# EAGLE board SparkFun_6DoF_LSM6DSV16X-Panel (EAGLE 9.6.2), part 1 of 6
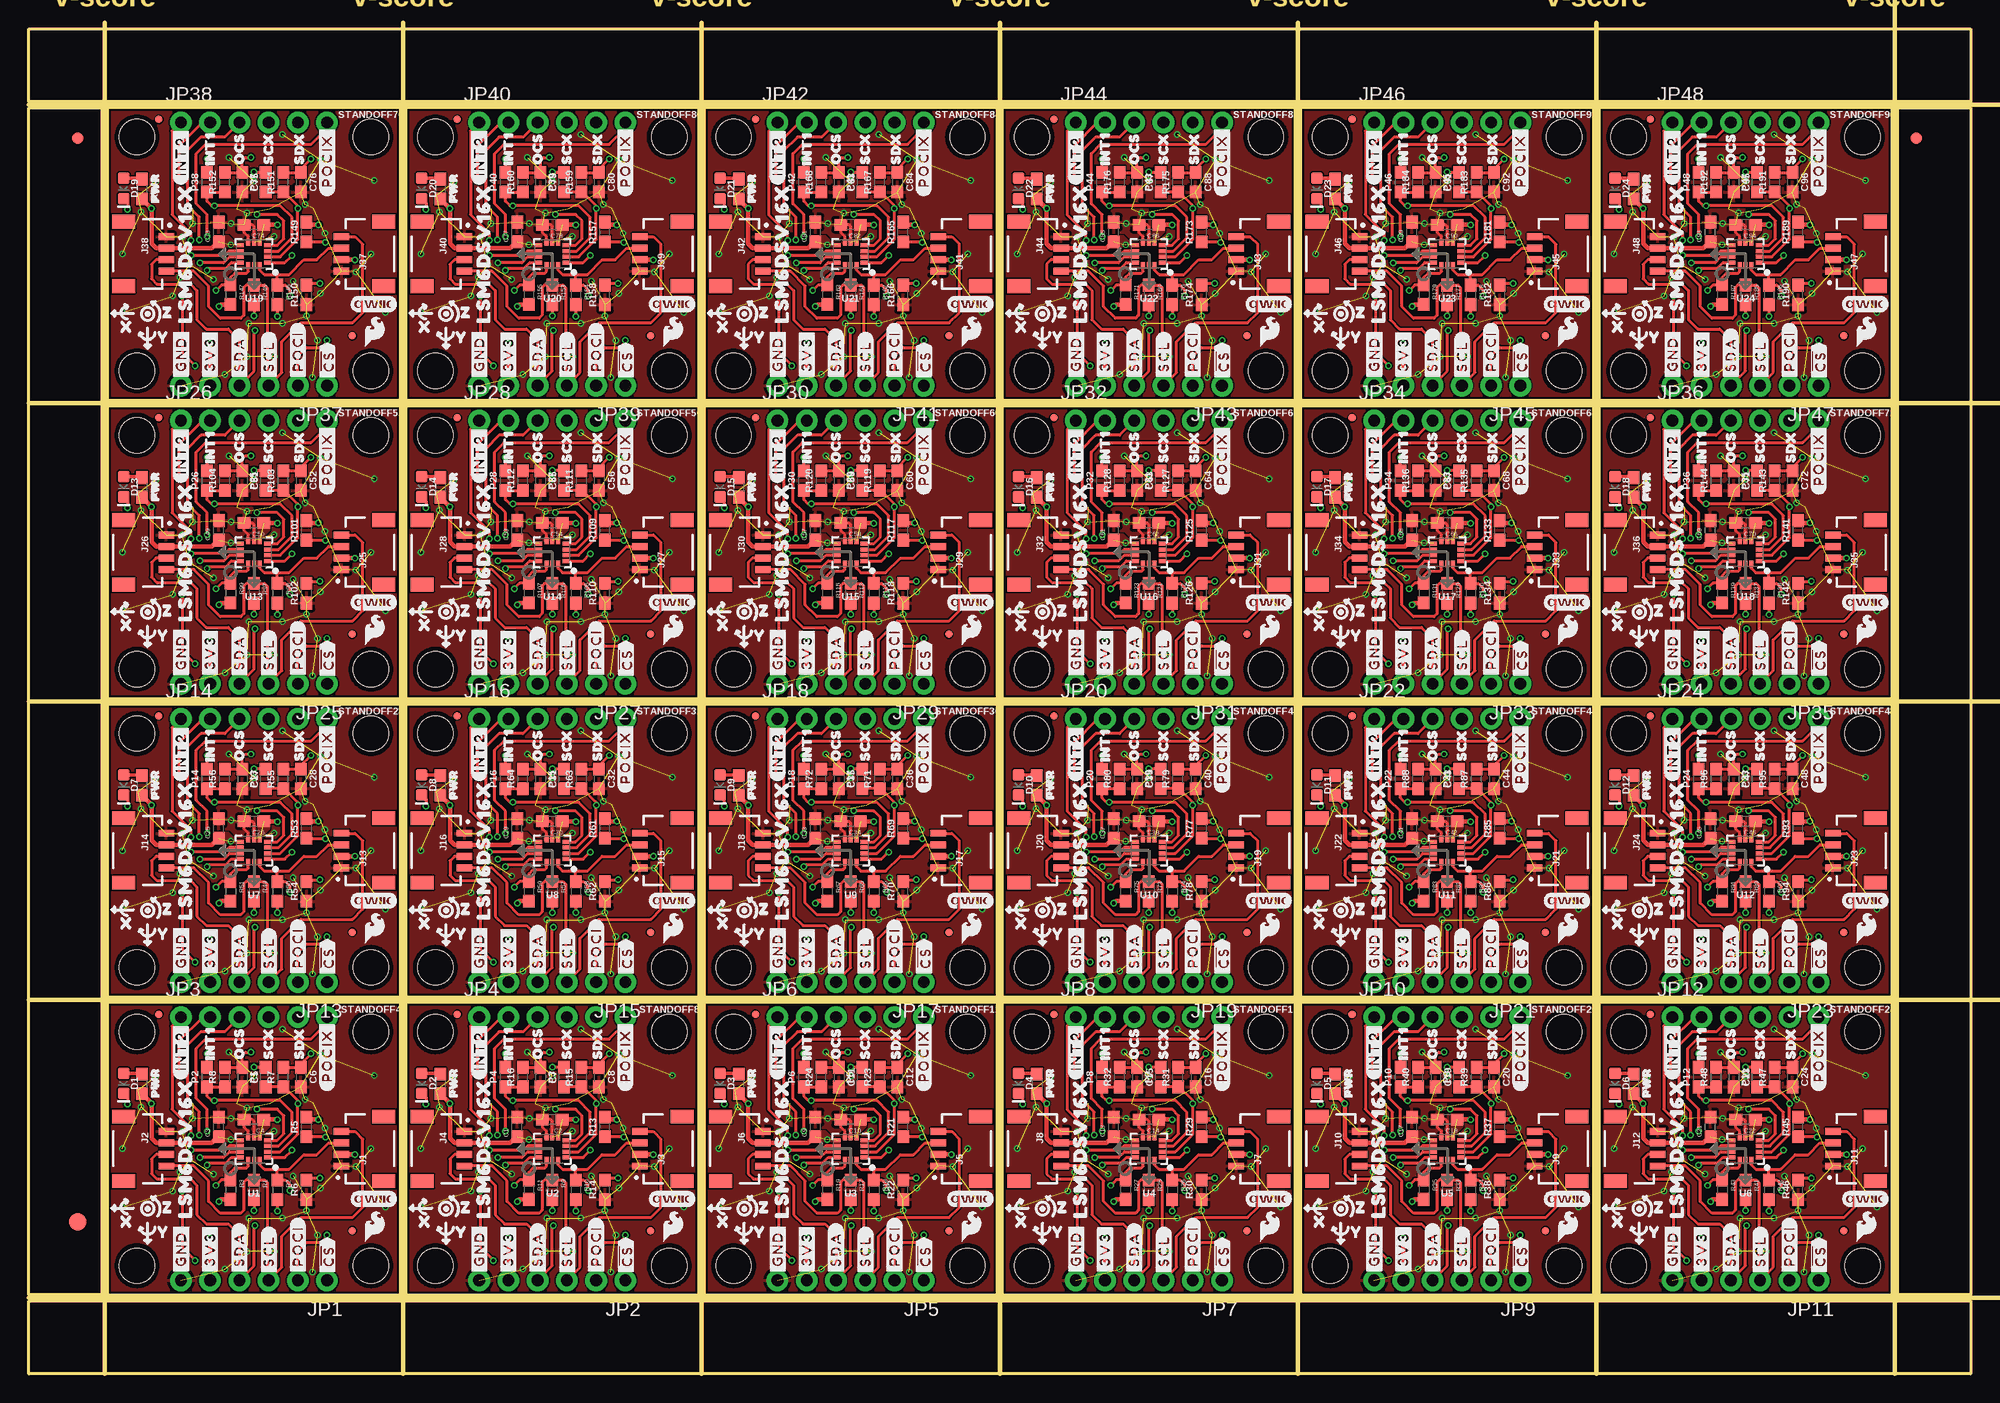
[diagram p0: board, top side]
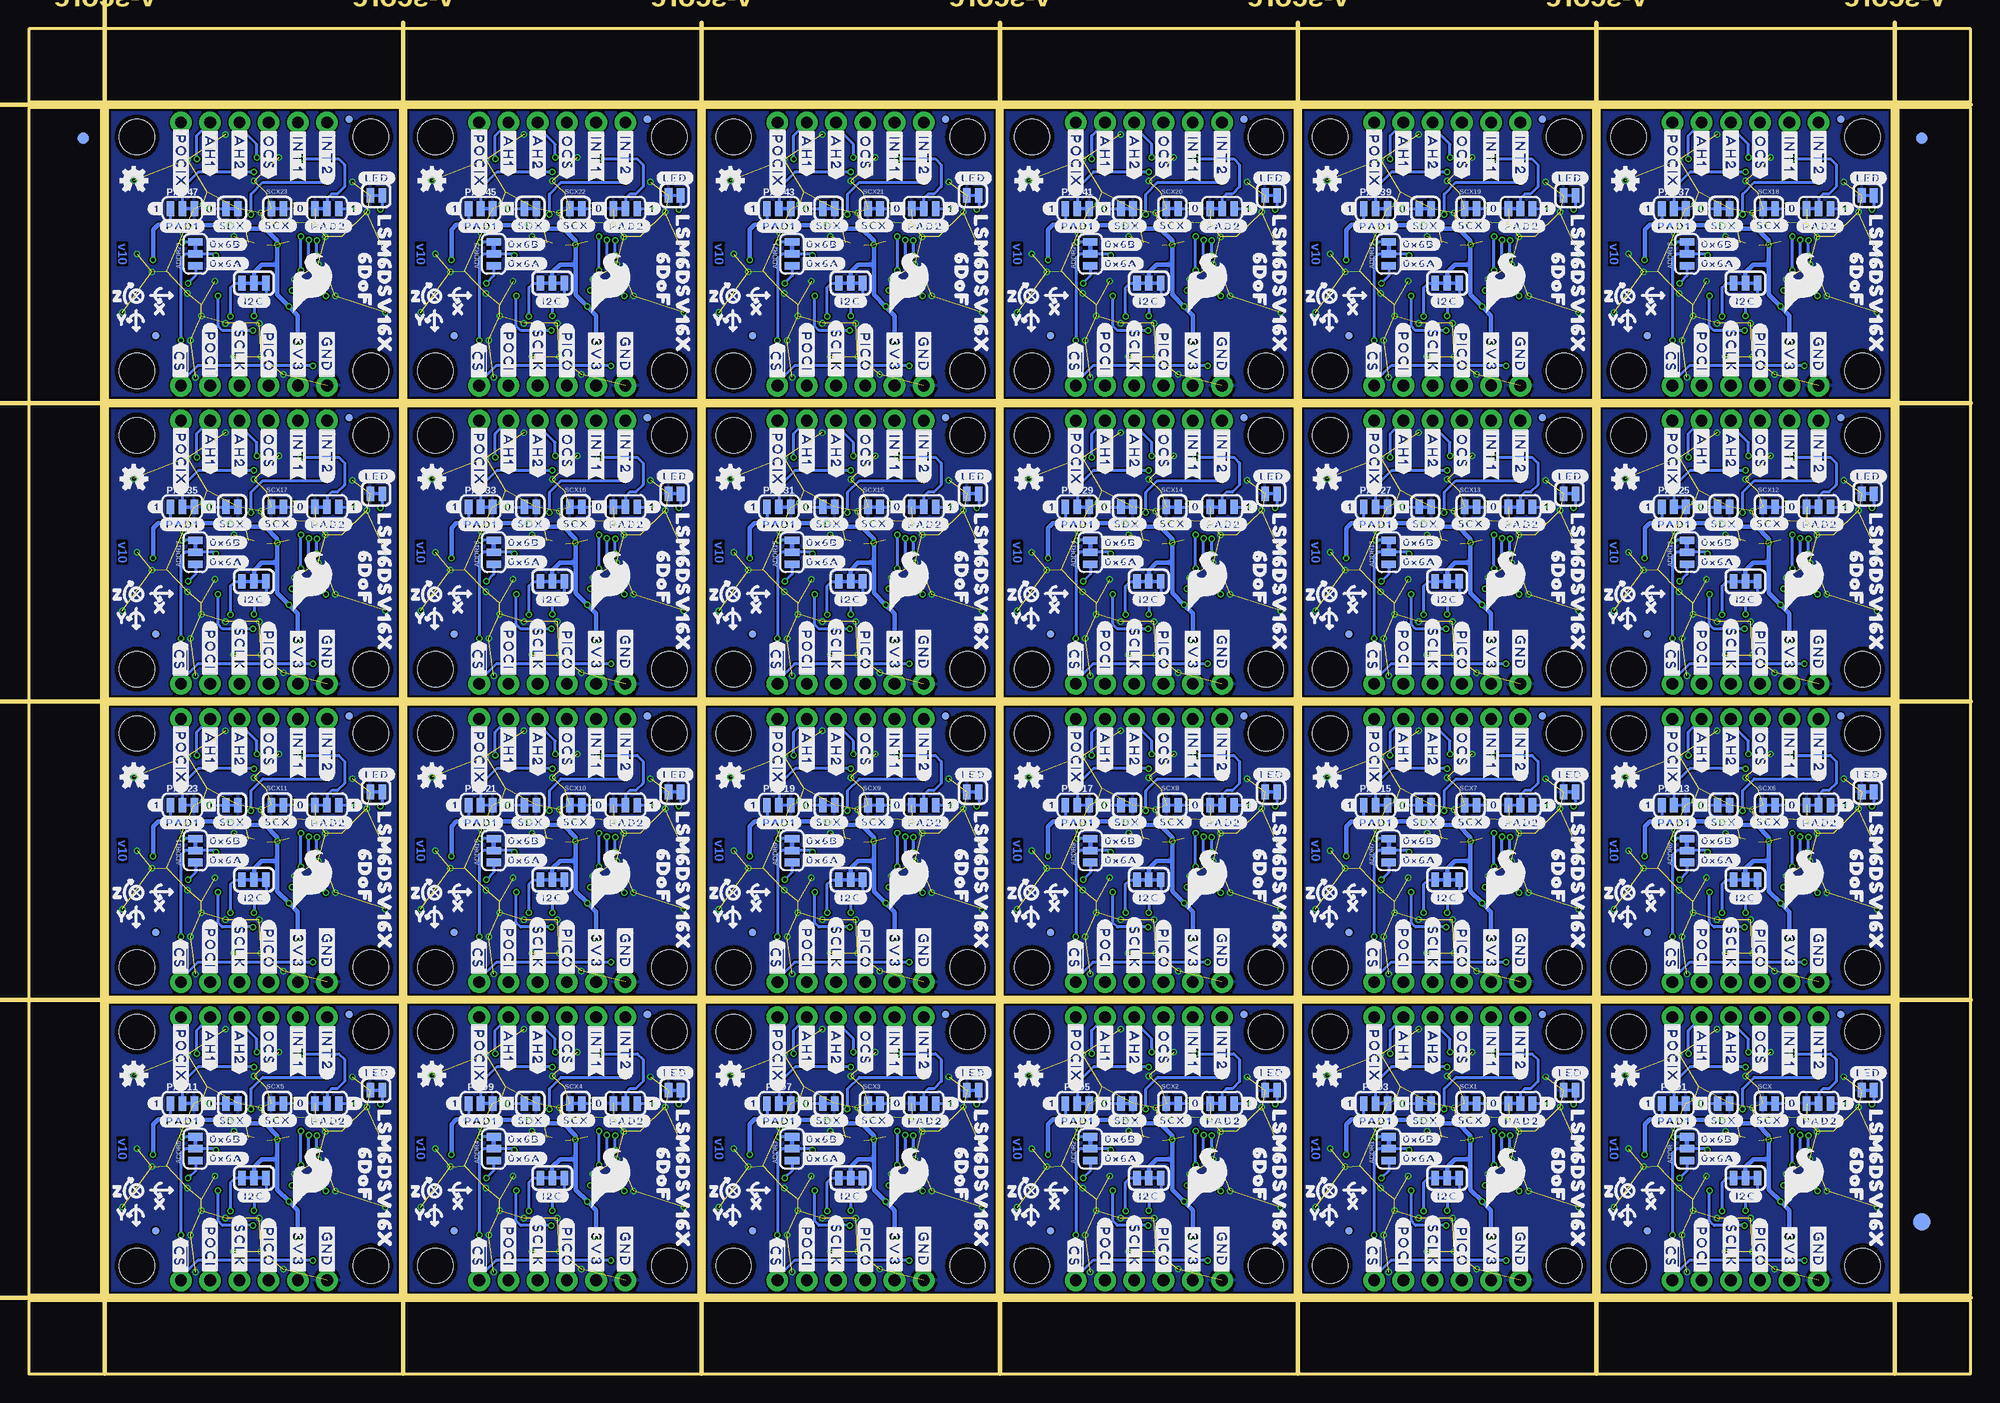
[diagram p1: board, bottom side, seen from below]

Size 168.66 x 116.84 mm. Coordinates in mm from the lower left corner, seen from the top.
Outline: 32.26,32.26 6.86,32.26 6.86,6.86 32.26,6.86 32.26,32.26
Outline: 58.17,32.26 32.77,32.26 32.77,6.86 58.17,6.86 58.17,32.26
Outline: 84.07,32.26 58.67,32.26 58.67,6.86 84.07,6.86 84.07,32.26
Outline: 109.98,32.26 84.58,32.26 84.58,6.86 109.98,6.86 109.98,32.26
Outline: 135.89,32.26 110.49,32.26 110.49,6.86 135.89,6.86 135.89,32.26
Outline: 161.8,32.26 136.4,32.26 136.4,6.86 161.8,6.86 161.8,32.26
Outline: 32.26,58.17 6.86,58.17 6.86,32.77 32.26,32.77 32.26,58.17
Outline: 58.17,58.17 32.77,58.17 32.77,32.77 58.17,32.77 58.17,58.17
Outline: 84.07,58.17 58.67,58.17 58.67,32.77 84.07,32.77 84.07,58.17
Outline: 109.98,58.17 84.58,58.17 84.58,32.77 109.98,32.77 109.98,58.17
Outline: 135.89,58.17 110.49,58.17 110.49,32.77 135.89,32.77 135.89,58.17
Outline: 161.8,58.17 136.4,58.17 136.4,32.77 161.8,32.77 161.8,58.17
Outline: 32.26,84.07 6.86,84.07 6.86,58.67 32.26,58.67 32.26,84.07
Outline: 58.17,84.07 32.77,84.07 32.77,58.67 58.17,58.67 58.17,84.07
Outline: 84.07,84.07 58.67,84.07 58.67,58.67 84.07,58.67 84.07,84.07
Outline: 109.98,84.07 84.58,84.07 84.58,58.67 109.98,58.67 109.98,84.07
Outline: 135.89,84.07 110.49,84.07 110.49,58.67 135.89,58.67 135.89,84.07
Outline: 161.8,84.07 136.4,84.07 136.4,58.67 161.8,58.67 161.8,84.07
Outline: 32.26,109.98 6.86,109.98 6.86,84.58 32.26,84.58 32.26,109.98
Outline: 58.17,109.98 32.77,109.98 32.77,84.58 58.17,84.58 58.17,109.98
Outline: 84.07,109.98 58.67,109.98 58.67,84.58 84.07,84.58 84.07,109.98
Outline: 109.98,109.98 84.58,109.98 84.58,84.58 109.98,84.58 109.98,109.98
Outline: 135.89,109.98 110.49,109.98 110.49,84.58 135.89,84.58 135.89,109.98
Outline: 161.8,109.98 136.4,109.98 136.4,84.58 161.8,84.58 161.8,109.98
Outline: 0,6.35 168.66,6.35 168.66,0 0,0 0,6.35
Outline: 162.31,109.98 168.66,109.98 168.66,6.86 162.31,6.86 162.31,109.98
Outline: 0,116.84 168.66,116.84 168.66,110.49 0,110.49 0,116.84
Outline: 0,109.98 6.35,109.98 6.35,6.86 0,6.86 0,109.98
Copper layers (1*16): Top 0.035mm / dielectric 1.5mm / Bottom 0.035mm
Design rules "SparkFun_6DoF_LSM6DSV16X": minimum track width 5mil, minimum drill 0.3mm, track to track 5mil, track to pad 5mil, pad to pad 5mil, via to via 5mil, smd to smd 5mil, copper to edge 7mil, drill to drill 7mil, minimum pad ring 5mil, minimum via ring 5mil, stop-mask expansion 2.5mil, vias tented up to drill 25mil, thermal gap 10mil
Milling: 12 lines

## Footprints (pad centres in the part's own frame; a part is rotated, then mirrored left to right if it is on the bottom)
SMT-JUMPER_3_1-NC_TRACE_SILK = smd 0.66 x 1.27: 1 -1.041,0; 2 0,0; 3 1.041,0
0603 = smd 1.1 x 1: 1 -0.85,0; 2 0.85,0
LED-0603 = smd 1 x 1: A -0.877,0; C 0.877,0
FIDUCIAL-1X2 = smd 1 x 1: 1 0,0
FIDUCIAL-1.5X3 = smd 1.5 x 1.5: 1 0,0
FIDUCIAL-MICRO = smd 0.635 x 0.635: 1 0,0
SMT-JUMPER_3_2-NC_TRACE_SILK = smd 0.66 x 1.27: 1 -1.041,0; 2 0,0; 3 1.041,0
JST04_1MM_RA = smd 0.6 x 1.35: 1 -1.5,0; 2 -0.5,0; 3 0.5,0; 4 1.5,0 | smd 1.2 x 2: NC1 2.8,-3.675; NC2 -2.8,-3.675
1X06_NO_SILK = drill 1.016 pad 1.88: 1 0,0; 2 2.54,0; 3 5.08,0; 4 7.62,0; 5 10.16,0; 6 12.7,0
SMT-JUMPER_2_NC_TRACE_SILK = smd 0.66 x 1.27: 1 -0.521,0; 2 0.521,0
STAND-OFF-TIGHT = hole 3.048: 0,0
LGA-14L = smd 0.575 x 0.35: P1 -1.163,0.75; P2 -1.163,0.25; P3 -1.163,-0.25; P4 -1.163,-0.75; P8 1.163,-0.75; P9 1.163,-0.25; P10 1.163,0.25; P11 1.163,0.75 | smd 0.35 x 0.575: P5 -0.5,-1; P6 0,-1; P7 0.5,-1; P12 0.5,1; P13 0,1; P14 -0.5,1

## Placement (x,y rotation side)
ADDR  JUMPER-SMT_3_1-NC_TRACE_SILK  [SMT-JUMPER_3_1-NC_TRACE_SILK]  24.64,19.56 90 bottom
ADDR1  JUMPER-SMT_3_1-NC_TRACE_SILK  [SMT-JUMPER_3_1-NC_TRACE_SILK]  50.55,19.56 90 bottom
ADDR2  JUMPER-SMT_3_1-NC_TRACE_SILK  [SMT-JUMPER_3_1-NC_TRACE_SILK]  76.45,19.56 90 bottom
ADDR3  JUMPER-SMT_3_1-NC_TRACE_SILK  [SMT-JUMPER_3_1-NC_TRACE_SILK]  102.36,19.56 90 bottom
ADDR4  JUMPER-SMT_3_1-NC_TRACE_SILK  [SMT-JUMPER_3_1-NC_TRACE_SILK]  128.27,19.56 90 bottom
ADDR5  JUMPER-SMT_3_1-NC_TRACE_SILK  [SMT-JUMPER_3_1-NC_TRACE_SILK]  154.18,19.56 90 bottom
ADDR6  JUMPER-SMT_3_1-NC_TRACE_SILK  [SMT-JUMPER_3_1-NC_TRACE_SILK]  24.64,45.47 90 bottom
ADDR7  JUMPER-SMT_3_1-NC_TRACE_SILK  [SMT-JUMPER_3_1-NC_TRACE_SILK]  50.55,45.47 90 bottom
ADDR8  JUMPER-SMT_3_1-NC_TRACE_SILK  [SMT-JUMPER_3_1-NC_TRACE_SILK]  76.45,45.47 90 bottom
ADDR9  JUMPER-SMT_3_1-NC_TRACE_SILK  [SMT-JUMPER_3_1-NC_TRACE_SILK]  102.36,45.47 90 bottom
ADDR10  JUMPER-SMT_3_1-NC_TRACE_SILK  [SMT-JUMPER_3_1-NC_TRACE_SILK]  128.27,45.47 90 bottom
ADDR11  JUMPER-SMT_3_1-NC_TRACE_SILK  [SMT-JUMPER_3_1-NC_TRACE_SILK]  154.18,45.47 90 bottom
ADDR12  JUMPER-SMT_3_1-NC_TRACE_SILK  [SMT-JUMPER_3_1-NC_TRACE_SILK]  24.64,71.37 90 bottom
ADDR13  JUMPER-SMT_3_1-NC_TRACE_SILK  [SMT-JUMPER_3_1-NC_TRACE_SILK]  50.55,71.37 90 bottom
ADDR14  JUMPER-SMT_3_1-NC_TRACE_SILK  [SMT-JUMPER_3_1-NC_TRACE_SILK]  76.45,71.37 90 bottom
ADDR15  JUMPER-SMT_3_1-NC_TRACE_SILK  [SMT-JUMPER_3_1-NC_TRACE_SILK]  102.36,71.37 90 bottom
ADDR16  JUMPER-SMT_3_1-NC_TRACE_SILK  [SMT-JUMPER_3_1-NC_TRACE_SILK]  128.27,71.37 90 bottom
ADDR17  JUMPER-SMT_3_1-NC_TRACE_SILK  [SMT-JUMPER_3_1-NC_TRACE_SILK]  154.18,71.37 90 bottom
ADDR18  JUMPER-SMT_3_1-NC_TRACE_SILK  [SMT-JUMPER_3_1-NC_TRACE_SILK]  24.64,97.28 90 bottom
ADDR19  JUMPER-SMT_3_1-NC_TRACE_SILK  [SMT-JUMPER_3_1-NC_TRACE_SILK]  50.55,97.28 90 bottom
ADDR20  JUMPER-SMT_3_1-NC_TRACE_SILK  [SMT-JUMPER_3_1-NC_TRACE_SILK]  76.45,97.28 90 bottom
ADDR21  JUMPER-SMT_3_1-NC_TRACE_SILK  [SMT-JUMPER_3_1-NC_TRACE_SILK]  102.36,97.28 90 bottom
ADDR22  JUMPER-SMT_3_1-NC_TRACE_SILK  [SMT-JUMPER_3_1-NC_TRACE_SILK]  128.27,97.28 90 bottom
ADDR23  JUMPER-SMT_3_1-NC_TRACE_SILK  [SMT-JUMPER_3_1-NC_TRACE_SILK]  154.18,97.28 90 bottom
C1  0.1uF  [0603]  42.42,21.46 90 top
C2  0.1uF  [0603]  45.47,22.1 180 top
C3  0.1uF  [0603]  16.51,21.46 90 top
C4  0.1uF  [0603]  19.56,22.1 180 top
C5  110pF  [0603]  18.54,25.78 270 top
C6  110pF  [0603]  23.62,25.78 270 top
C7  110pF  [0603]  44.45,25.78 270 top
C8  110pF  [0603]  49.53,25.78 270 top
C9  0.1uF  [0603]  68.33,21.46 90 top
C10  0.1uF  [0603]  71.37,22.1 180 top
C11  110pF  [0603]  70.36,25.78 270 top
C12  110pF  [0603]  75.44,25.78 270 top
C13  0.1uF  [0603]  94.23,21.46 90 top
C14  0.1uF  [0603]  97.28,22.1 180 top
C15  110pF  [0603]  96.27,25.78 270 top
C16  110pF  [0603]  101.35,25.78 270 top
C17  0.1uF  [0603]  120.14,21.46 90 top
C18  0.1uF  [0603]  123.19,22.1 180 top
C19  110pF  [0603]  122.17,25.78 270 top
C20  110pF  [0603]  127.25,25.78 270 top
C21  0.1uF  [0603]  146.05,21.46 90 top
C22  0.1uF  [0603]  149.1,22.1 180 top
C23  110pF  [0603]  148.08,25.78 270 top
C24  110pF  [0603]  153.16,25.78 270 top
C25  0.1uF  [0603]  16.51,47.37 90 top
C26  0.1uF  [0603]  19.56,48.01 180 top
C27  110pF  [0603]  18.54,51.69 270 top
C28  110pF  [0603]  23.62,51.69 270 top
C29  0.1uF  [0603]  42.42,47.37 90 top
C30  0.1uF  [0603]  45.47,48.01 180 top
C31  110pF  [0603]  44.45,51.69 270 top
C32  110pF  [0603]  49.53,51.69 270 top
C33  0.1uF  [0603]  68.33,47.37 90 top
C34  0.1uF  [0603]  71.37,48.01 180 top
C35  110pF  [0603]  70.36,51.69 270 top
C36  110pF  [0603]  75.44,51.69 270 top
C37  0.1uF  [0603]  94.23,47.37 90 top
C38  0.1uF  [0603]  97.28,48.01 180 top
C39  110pF  [0603]  96.27,51.69 270 top
C40  110pF  [0603]  101.35,51.69 270 top
C41  0.1uF  [0603]  120.14,47.37 90 top
C42  0.1uF  [0603]  123.19,48.01 180 top
C43  110pF  [0603]  122.17,51.69 270 top
C44  110pF  [0603]  127.25,51.69 270 top
C45  0.1uF  [0603]  146.05,47.37 90 top
C46  0.1uF  [0603]  149.1,48.01 180 top
C47  110pF  [0603]  148.08,51.69 270 top
C48  110pF  [0603]  153.16,51.69 270 top
C49  0.1uF  [0603]  16.51,73.28 90 top
C50  0.1uF  [0603]  19.56,73.91 180 top
C51  110pF  [0603]  18.54,77.6 270 top
C52  110pF  [0603]  23.62,77.6 270 top
C53  0.1uF  [0603]  42.42,73.28 90 top
C54  0.1uF  [0603]  45.47,73.91 180 top
C55  110pF  [0603]  44.45,77.6 270 top
C56  110pF  [0603]  49.53,77.6 270 top
C57  0.1uF  [0603]  68.33,73.28 90 top
C58  0.1uF  [0603]  71.37,73.91 180 top
C59  110pF  [0603]  70.36,77.6 270 top
C60  110pF  [0603]  75.44,77.6 270 top
C61  0.1uF  [0603]  94.23,73.28 90 top
C62  0.1uF  [0603]  97.28,73.91 180 top
C63  110pF  [0603]  96.27,77.6 270 top
C64  110pF  [0603]  101.35,77.6 270 top
C65  0.1uF  [0603]  120.14,73.28 90 top
C66  0.1uF  [0603]  123.19,73.91 180 top
C67  110pF  [0603]  122.17,77.6 270 top
C68  110pF  [0603]  127.25,77.6 270 top
C69  0.1uF  [0603]  146.05,73.28 90 top
C70  0.1uF  [0603]  149.1,73.91 180 top
C71  110pF  [0603]  148.08,77.6 270 top
C72  110pF  [0603]  153.16,77.6 270 top
C73  0.1uF  [0603]  16.51,99.19 90 top
C74  0.1uF  [0603]  19.56,99.82 180 top
C75  110pF  [0603]  18.54,103.51 270 top
C76  110pF  [0603]  23.62,103.51 270 top
C77  0.1uF  [0603]  42.42,99.19 90 top
C78  0.1uF  [0603]  45.47,99.82 180 top
C79  110pF  [0603]  44.45,103.51 270 top
C80  110pF  [0603]  49.53,103.51 270 top
C81  0.1uF  [0603]  68.33,99.19 90 top
C82  0.1uF  [0603]  71.37,99.82 180 top
C83  110pF  [0603]  70.36,103.51 270 top
C84  110pF  [0603]  75.44,103.51 270 top
C85  0.1uF  [0603]  94.23,99.19 90 top
C86  0.1uF  [0603]  97.28,99.82 180 top
C87  110pF  [0603]  96.27,103.51 270 top
C88  110pF  [0603]  101.35,103.51 270 top
C89  0.1uF  [0603]  120.14,99.19 90 top
C90  0.1uF  [0603]  123.19,99.82 180 top
C91  110pF  [0603]  122.17,103.51 270 top
C92  110pF  [0603]  127.25,103.51 270 top
C93  0.1uF  [0603]  146.05,99.19 90 top
C94  0.1uF  [0603]  149.1,99.82 180 top
C95  110pF  [0603]  148.08,103.51 270 top
C96  110pF  [0603]  153.16,103.51 270 top
D1  RED  [LED-0603]  8.23,25.25 270 top
D2  RED  [LED-0603]  34.14,25.25 270 top
D3  RED  [LED-0603]  60.05,25.25 270 top
D4  RED  [LED-0603]  85.95,25.25 270 top
D5  RED  [LED-0603]  111.86,25.25 270 top
D6  RED  [LED-0603]  137.77,25.25 270 top
D7  RED  [LED-0603]  8.23,51.16 270 top
D8  RED  [LED-0603]  34.14,51.16 270 top
D9  RED  [LED-0603]  60.05,51.16 270 top
D10  RED  [LED-0603]  85.95,51.16 270 top
D11  RED  [LED-0603]  111.86,51.16 270 top
D12  RED  [LED-0603]  137.77,51.16 270 top
D13  RED  [LED-0603]  8.23,77.06 270 top
D14  RED  [LED-0603]  34.14,77.06 270 top
D15  RED  [LED-0603]  60.05,77.06 270 top
D16  RED  [LED-0603]  85.95,77.06 270 top
D17  RED  [LED-0603]  111.86,77.06 270 top
D18  RED  [LED-0603]  137.77,77.06 270 top
D19  RED  [LED-0603]  8.23,102.97 270 top
D20  RED  [LED-0603]  34.14,102.97 270 top
D21  RED  [LED-0603]  60.05,102.97 270 top
D22  RED  [LED-0603]  85.95,102.97 270 top
D23  RED  [LED-0603]  111.86,102.97 270 top
D24  RED  [LED-0603]  137.77,102.97 270 top
E$1  [FIDUCIAL-1X2]  4.23,107.31 0 top
E$2  [FIDUCIAL-1X2]  4.23,107.31 0 bottom
E$3  [FIDUCIAL-1X2]  163.91,107.31 0 top
E$4  [FIDUCIAL-1X2]  163.91,107.31 0 bottom
E$5  [FIDUCIAL-1.5X3]  4.23,13.21 0 top
E$6  [FIDUCIAL-1.5X3]  4.23,13.21 0 bottom
FD1  FIDUCIALUFIDUCIAL  [FIDUCIAL-MICRO]  11.3,31.24 0 bottom
FD2  FIDUCIALUFIDUCIAL  [FIDUCIAL-MICRO]  28.09,12.45 0 bottom
FD3  FIDUCIALUFIDUCIAL  [FIDUCIAL-MICRO]  37.21,31.24 0 bottom
FD4  FIDUCIALUFIDUCIAL  [FIDUCIAL-MICRO]  54,12.45 0 bottom
FD5  FIDUCIALUFIDUCIAL  [FIDUCIAL-MICRO]  63.12,31.24 0 bottom
FD6  FIDUCIALUFIDUCIAL  [FIDUCIAL-MICRO]  79.91,12.45 0 bottom
FD7  FIDUCIALUFIDUCIAL  [FIDUCIAL-MICRO]  89.03,31.24 0 bottom
FD8  FIDUCIALUFIDUCIAL  [FIDUCIAL-MICRO]  105.82,12.45 0 bottom
FD9  FIDUCIALUFIDUCIAL  [FIDUCIAL-MICRO]  114.94,31.24 0 bottom
FD10  FIDUCIALUFIDUCIAL  [FIDUCIAL-MICRO]  131.72,12.45 0 bottom
FD11  FIDUCIALUFIDUCIAL  [FIDUCIAL-MICRO]  140.84,31.24 0 bottom
FD12  FIDUCIALUFIDUCIAL  [FIDUCIAL-MICRO]  157.63,12.45 0 bottom
FD13  FIDUCIALUFIDUCIAL  [FIDUCIAL-MICRO]  11.3,57.15 0 bottom
FD14  FIDUCIALUFIDUCIAL  [FIDUCIAL-MICRO]  28.09,38.35 0 bottom
FD15  FIDUCIALUFIDUCIAL  [FIDUCIAL-MICRO]  37.21,57.15 0 bottom
FD16  FIDUCIALUFIDUCIAL  [FIDUCIAL-MICRO]  54,38.35 0 bottom
FD17  FIDUCIALUFIDUCIAL  [FIDUCIAL-MICRO]  63.12,57.15 0 bottom
FD18  FIDUCIALUFIDUCIAL  [FIDUCIAL-MICRO]  79.91,38.35 0 bottom
FD19  FIDUCIALUFIDUCIAL  [FIDUCIAL-MICRO]  89.03,57.15 0 bottom
FD20  FIDUCIALUFIDUCIAL  [FIDUCIAL-MICRO]  105.82,38.35 0 bottom
FD21  FIDUCIALUFIDUCIAL  [FIDUCIAL-MICRO]  114.94,57.15 0 bottom
FD22  FIDUCIALUFIDUCIAL  [FIDUCIAL-MICRO]  131.72,38.35 0 bottom
FD23  FIDUCIALUFIDUCIAL  [FIDUCIAL-MICRO]  140.84,57.15 0 bottom
FD24  FIDUCIALUFIDUCIAL  [FIDUCIAL-MICRO]  157.63,38.35 0 bottom
FD25  FIDUCIALUFIDUCIAL  [FIDUCIAL-MICRO]  11.3,83.06 0 bottom
FD26  FIDUCIALUFIDUCIAL  [FIDUCIAL-MICRO]  28.09,64.26 0 bottom
FD27  FIDUCIALUFIDUCIAL  [FIDUCIAL-MICRO]  37.21,83.06 0 bottom
FD28  FIDUCIALUFIDUCIAL  [FIDUCIAL-MICRO]  54,64.26 0 bottom
FD29  FIDUCIALUFIDUCIAL  [FIDUCIAL-MICRO]  63.12,83.06 0 bottom
FD30  FIDUCIALUFIDUCIAL  [FIDUCIAL-MICRO]  79.91,64.26 0 bottom
FD31  FIDUCIALUFIDUCIAL  [FIDUCIAL-MICRO]  89.03,83.06 0 bottom
FD32  FIDUCIALUFIDUCIAL  [FIDUCIAL-MICRO]  105.82,64.26 0 bottom
FD33  FIDUCIALUFIDUCIAL  [FIDUCIAL-MICRO]  114.94,83.06 0 bottom
FD34  FIDUCIALUFIDUCIAL  [FIDUCIAL-MICRO]  131.72,64.26 0 bottom
FD35  FIDUCIALUFIDUCIAL  [FIDUCIAL-MICRO]  140.84,83.06 0 bottom
FD36  FIDUCIALUFIDUCIAL  [FIDUCIAL-MICRO]  157.63,64.26 0 bottom
FD37  FIDUCIALUFIDUCIAL  [FIDUCIAL-MICRO]  11.3,108.97 0 bottom
FD38  FIDUCIALUFIDUCIAL  [FIDUCIAL-MICRO]  28.09,90.17 0 bottom
FD39  FIDUCIALUFIDUCIAL  [FIDUCIAL-MICRO]  37.21,108.97 0 bottom
FD40  FIDUCIALUFIDUCIAL  [FIDUCIAL-MICRO]  54,90.17 0 bottom
FD41  FIDUCIALUFIDUCIAL  [FIDUCIAL-MICRO]  63.12,108.97 0 bottom
FD42  FIDUCIALUFIDUCIAL  [FIDUCIAL-MICRO]  79.91,90.17 0 bottom
FD43  FIDUCIALUFIDUCIAL  [FIDUCIAL-MICRO]  89.03,108.97 0 bottom
FD44  FIDUCIALUFIDUCIAL  [FIDUCIAL-MICRO]  105.82,90.17 0 bottom
FD45  FIDUCIALUFIDUCIAL  [FIDUCIAL-MICRO]  114.94,108.97 0 bottom
FD46  FIDUCIALUFIDUCIAL  [FIDUCIAL-MICRO]  131.72,90.17 0 bottom
FD47  FIDUCIALUFIDUCIAL  [FIDUCIAL-MICRO]  140.84,108.97 0 bottom
FD48  FIDUCIALUFIDUCIAL  [FIDUCIAL-MICRO]  157.63,90.17 0 bottom
FID1  FIDUCIALUFIDUCIAL  [FIDUCIAL-MICRO]  11.3,31.24 0 top
FID2  FIDUCIALUFIDUCIAL  [FIDUCIAL-MICRO]  28.09,12.45 0 top
FID3  FIDUCIALUFIDUCIAL  [FIDUCIAL-MICRO]  37.21,31.24 0 top
FID4  FIDUCIALUFIDUCIAL  [FIDUCIAL-MICRO]  54,12.45 0 top
FID5  FIDUCIALUFIDUCIAL  [FIDUCIAL-MICRO]  63.12,31.24 0 top
FID6  FIDUCIALUFIDUCIAL  [FIDUCIAL-MICRO]  79.91,12.45 0 top
FID7  FIDUCIALUFIDUCIAL  [FIDUCIAL-MICRO]  89.03,31.24 0 top
FID8  FIDUCIALUFIDUCIAL  [FIDUCIAL-MICRO]  105.82,12.45 0 top
FID9  FIDUCIALUFIDUCIAL  [FIDUCIAL-MICRO]  114.94,31.24 0 top
FID10  FIDUCIALUFIDUCIAL  [FIDUCIAL-MICRO]  131.72,12.45 0 top
FID11  FIDUCIALUFIDUCIAL  [FIDUCIAL-MICRO]  140.84,31.24 0 top
FID12  FIDUCIALUFIDUCIAL  [FIDUCIAL-MICRO]  157.63,12.45 0 top
FID13  FIDUCIALUFIDUCIAL  [FIDUCIAL-MICRO]  11.3,57.15 0 top
FID14  FIDUCIALUFIDUCIAL  [FIDUCIAL-MICRO]  28.09,38.35 0 top
FID15  FIDUCIALUFIDUCIAL  [FIDUCIAL-MICRO]  37.21,57.15 0 top
FID16  FIDUCIALUFIDUCIAL  [FIDUCIAL-MICRO]  54,38.35 0 top
FID17  FIDUCIALUFIDUCIAL  [FIDUCIAL-MICRO]  63.12,57.15 0 top
FID18  FIDUCIALUFIDUCIAL  [FIDUCIAL-MICRO]  79.91,38.35 0 top
FID19  FIDUCIALUFIDUCIAL  [FIDUCIAL-MICRO]  89.03,57.15 0 top
FID20  FIDUCIALUFIDUCIAL  [FIDUCIAL-MICRO]  105.82,38.35 0 top
FID21  FIDUCIALUFIDUCIAL  [FIDUCIAL-MICRO]  114.94,57.15 0 top
FID22  FIDUCIALUFIDUCIAL  [FIDUCIAL-MICRO]  131.72,38.35 0 top
FID23  FIDUCIALUFIDUCIAL  [FIDUCIAL-MICRO]  140.84,57.15 0 top
FID24  FIDUCIALUFIDUCIAL  [FIDUCIAL-MICRO]  157.63,38.35 0 top
FID25  FIDUCIALUFIDUCIAL  [FIDUCIAL-MICRO]  11.3,83.06 0 top
FID26  FIDUCIALUFIDUCIAL  [FIDUCIAL-MICRO]  28.09,64.26 0 top
FID27  FIDUCIALUFIDUCIAL  [FIDUCIAL-MICRO]  37.21,83.06 0 top
FID28  FIDUCIALUFIDUCIAL  [FIDUCIAL-MICRO]  54,64.26 0 top
FID29  FIDUCIALUFIDUCIAL  [FIDUCIAL-MICRO]  63.12,83.06 0 top
FID30  FIDUCIALUFIDUCIAL  [FIDUCIAL-MICRO]  79.91,64.26 0 top
FID31  FIDUCIALUFIDUCIAL  [FIDUCIAL-MICRO]  89.03,83.06 0 top
FID32  FIDUCIALUFIDUCIAL  [FIDUCIAL-MICRO]  105.82,64.26 0 top
FID33  FIDUCIALUFIDUCIAL  [FIDUCIAL-MICRO]  114.94,83.06 0 top
FID34  FIDUCIALUFIDUCIAL  [FIDUCIAL-MICRO]  131.72,64.26 0 top
FID35  FIDUCIALUFIDUCIAL  [FIDUCIAL-MICRO]  140.84,83.06 0 top
FID36  FIDUCIALUFIDUCIAL  [FIDUCIAL-MICRO]  157.63,64.26 0 top
FID37  FIDUCIALUFIDUCIAL  [FIDUCIAL-MICRO]  11.3,108.97 0 top
FID38  FIDUCIALUFIDUCIAL  [FIDUCIAL-MICRO]  28.09,90.17 0 top
FID39  FIDUCIALUFIDUCIAL  [FIDUCIAL-MICRO]  37.21,108.97 0 top
FID40  FIDUCIALUFIDUCIAL  [FIDUCIAL-MICRO]  54,90.17 0 top
FID41  FIDUCIALUFIDUCIAL  [FIDUCIAL-MICRO]  63.12,108.97 0 top
FID42  FIDUCIALUFIDUCIAL  [FIDUCIAL-MICRO]  79.91,90.17 0 top
FID43  FIDUCIALUFIDUCIAL  [FIDUCIAL-MICRO]  89.03,108.97 0 top
FID44  FIDUCIALUFIDUCIAL  [FIDUCIAL-MICRO]  105.82,90.17 0 top
FID45  FIDUCIALUFIDUCIAL  [FIDUCIAL-MICRO]  114.94,108.97 0 top
FID46  FIDUCIALUFIDUCIAL  [FIDUCIAL-MICRO]  131.72,90.17 0 top
FID47  FIDUCIALUFIDUCIAL  [FIDUCIAL-MICRO]  140.84,108.97 0 top
FID48  FIDUCIALUFIDUCIAL  [FIDUCIAL-MICRO]  157.63,90.17 0 top
FRAME1  FRAME-LEDGER  [CREATIVE_COMMONS]  14.99,-16 0 top  (outside the outline)
FRAME2  FRAME-LEDGER  [CREATIVE_COMMONS]  -10.92,-16 0 top  (outside the outline)
FRAME3  FRAME-LEDGER  [CREATIVE_COMMONS]  40.89,-16 0 top  (outside the outline)
FRAME4  FRAME-LEDGER  [CREATIVE_COMMONS]  66.8,-16 0 top  (outside the outline)
FRAME5  FRAME-LEDGER  [CREATIVE_COMMONS]  92.71,-16 0 top  (outside the outline)
FRAME6  FRAME-LEDGER  [CREATIVE_COMMONS]  118.62,-16 0 top  (outside the outline)
FRAME7  FRAME-LEDGER  [CREATIVE_COMMONS]  -10.92,9.91 0 top  (outside the outline)
FRAME8  FRAME-LEDGER  [CREATIVE_COMMONS]  14.99,9.91 0 top
FRAME9  FRAME-LEDGER  [CREATIVE_COMMONS]  40.89,9.91 0 top
FRAME10  FRAME-LEDGER  [CREATIVE_COMMONS]  66.8,9.91 0 top
FRAME11  FRAME-LEDGER  [CREATIVE_COMMONS]  92.71,9.91 0 top
FRAME12  FRAME-LEDGER  [CREATIVE_COMMONS]  118.62,9.91 0 top
FRAME13  FRAME-LEDGER  [CREATIVE_COMMONS]  -10.92,35.81 0 top  (outside the outline)
FRAME14  FRAME-LEDGER  [CREATIVE_COMMONS]  14.99,35.81 0 top
FRAME15  FRAME-LEDGER  [CREATIVE_COMMONS]  40.89,35.81 0 top
FRAME16  FRAME-LEDGER  [CREATIVE_COMMONS]  66.8,35.81 0 top
FRAME17  FRAME-LEDGER  [CREATIVE_COMMONS]  92.71,35.81 0 top
FRAME18  FRAME-LEDGER  [CREATIVE_COMMONS]  118.62,35.81 0 top
FRAME19  FRAME-LEDGER  [CREATIVE_COMMONS]  -10.92,61.72 0 top  (outside the outline)
FRAME20  FRAME-LEDGER  [CREATIVE_COMMONS]  14.99,61.72 0 top
FRAME21  FRAME-LEDGER  [CREATIVE_COMMONS]  40.89,61.72 0 top
FRAME22  FRAME-LEDGER  [CREATIVE_COMMONS]  66.8,61.72 0 top
FRAME23  FRAME-LEDGER  [CREATIVE_COMMONS]  92.71,61.72 0 top
FRAME24  FRAME-LEDGER  [CREATIVE_COMMONS]  118.62,61.72 0 top
I2C_PU  S_MODE  [SMT-JUMPER_3_2-NC_TRACE_SILK]  19.56,17.02 180 bottom
I2C_PU1  S_MODE  [SMT-JUMPER_3_2-NC_TRACE_SILK]  45.47,17.02 180 bottom
I2C_PU2  S_MODE  [SMT-JUMPER_3_2-NC_TRACE_SILK]  71.37,17.02 180 bottom
I2C_PU3  S_MODE  [SMT-JUMPER_3_2-NC_TRACE_SILK]  97.28,17.02 180 bottom
I2C_PU4  S_MODE  [SMT-JUMPER_3_2-NC_TRACE_SILK]  123.19,17.02 180 bottom
I2C_PU5  S_MODE  [SMT-JUMPER_3_2-NC_TRACE_SILK]  149.1,17.02 180 bottom
I2C_PU6  S_MODE  [SMT-JUMPER_3_2-NC_TRACE_SILK]  19.56,42.93 180 bottom
I2C_PU7  S_MODE  [SMT-JUMPER_3_2-NC_TRACE_SILK]  45.47,42.93 180 bottom
I2C_PU8  S_MODE  [SMT-JUMPER_3_2-NC_TRACE_SILK]  71.37,42.93 180 bottom
I2C_PU9  S_MODE  [SMT-JUMPER_3_2-NC_TRACE_SILK]  97.28,42.93 180 bottom
I2C_PU10  S_MODE  [SMT-JUMPER_3_2-NC_TRACE_SILK]  123.19,42.93 180 bottom
I2C_PU11  S_MODE  [SMT-JUMPER_3_2-NC_TRACE_SILK]  149.1,42.93 180 bottom
I2C_PU12  S_MODE  [SMT-JUMPER_3_2-NC_TRACE_SILK]  19.56,68.83 180 bottom
I2C_PU13  S_MODE  [SMT-JUMPER_3_2-NC_TRACE_SILK]  45.47,68.83 180 bottom
I2C_PU14  S_MODE  [SMT-JUMPER_3_2-NC_TRACE_SILK]  71.37,68.83 180 bottom
I2C_PU15  S_MODE  [SMT-JUMPER_3_2-NC_TRACE_SILK]  97.28,68.83 180 bottom
I2C_PU16  S_MODE  [SMT-JUMPER_3_2-NC_TRACE_SILK]  123.19,68.83 180 bottom
I2C_PU17  S_MODE  [SMT-JUMPER_3_2-NC_TRACE_SILK]  149.1,68.83 180 bottom
I2C_PU18  S_MODE  [SMT-JUMPER_3_2-NC_TRACE_SILK]  19.56,94.74 180 bottom
I2C_PU19  S_MODE  [SMT-JUMPER_3_2-NC_TRACE_SILK]  45.47,94.74 180 bottom
I2C_PU20  S_MODE  [SMT-JUMPER_3_2-NC_TRACE_SILK]  71.37,94.74 180 bottom
I2C_PU21  S_MODE  [SMT-JUMPER_3_2-NC_TRACE_SILK]  97.28,94.74 180 bottom
I2C_PU22  S_MODE  [SMT-JUMPER_3_2-NC_TRACE_SILK]  123.19,94.74 180 bottom
I2C_PU23  S_MODE  [SMT-JUMPER_3_2-NC_TRACE_SILK]  149.1,94.74 180 bottom
J1  QWIIC_RIGHT_ANGLE  [JST04_1MM_RA]  27.15,19.56 90 top
J2  QWIIC_RIGHT_ANGLE  [JST04_1MM_RA]  11.94,19.56 270 top
J3  QWIIC_RIGHT_ANGLE  [JST04_1MM_RA]  53.06,19.56 90 top
J4  QWIIC_RIGHT_ANGLE  [JST04_1MM_RA]  37.85,19.56 270 top
J5  QWIIC_RIGHT_ANGLE  [JST04_1MM_RA]  78.97,19.56 90 top
J6  QWIIC_RIGHT_ANGLE  [JST04_1MM_RA]  63.75,19.56 270 top
J7  QWIIC_RIGHT_ANGLE  [JST04_1MM_RA]  104.88,19.56 90 top
J8  QWIIC_RIGHT_ANGLE  [JST04_1MM_RA]  89.66,19.56 270 top
J9  QWIIC_RIGHT_ANGLE  [JST04_1MM_RA]  130.78,19.56 90 top
J10  QWIIC_RIGHT_ANGLE  [JST04_1MM_RA]  115.57,19.56 270 top
J11  QWIIC_RIGHT_ANGLE  [JST04_1MM_RA]  156.69,19.56 90 top
J12  QWIIC_RIGHT_ANGLE  [JST04_1MM_RA]  141.48,19.56 270 top
J13  QWIIC_RIGHT_ANGLE  [JST04_1MM_RA]  27.15,45.47 90 top
J14  QWIIC_RIGHT_ANGLE  [JST04_1MM_RA]  11.94,45.47 270 top
J15  QWIIC_RIGHT_ANGLE  [JST04_1MM_RA]  53.06,45.47 90 top
J16  QWIIC_RIGHT_ANGLE  [JST04_1MM_RA]  37.85,45.47 270 top
J17  QWIIC_RIGHT_ANGLE  [JST04_1MM_RA]  78.97,45.47 90 top
J18  QWIIC_RIGHT_ANGLE  [JST04_1MM_RA]  63.75,45.47 270 top
J19  QWIIC_RIGHT_ANGLE  [JST04_1MM_RA]  104.88,45.47 90 top
J20  QWIIC_RIGHT_ANGLE  [JST04_1MM_RA]  89.66,45.47 270 top
J21  QWIIC_RIGHT_ANGLE  [JST04_1MM_RA]  130.78,45.47 90 top
J22  QWIIC_RIGHT_ANGLE  [JST04_1MM_RA]  115.57,45.47 270 top
J23  QWIIC_RIGHT_ANGLE  [JST04_1MM_RA]  156.69,45.47 90 top
J24  QWIIC_RIGHT_ANGLE  [JST04_1MM_RA]  141.48,45.47 270 top
J25  QWIIC_RIGHT_ANGLE  [JST04_1MM_RA]  27.15,71.37 90 top
J26  QWIIC_RIGHT_ANGLE  [JST04_1MM_RA]  11.94,71.37 270 top
J27  QWIIC_RIGHT_ANGLE  [JST04_1MM_RA]  53.06,71.37 90 top
J28  QWIIC_RIGHT_ANGLE  [JST04_1MM_RA]  37.85,71.37 270 top
J29  QWIIC_RIGHT_ANGLE  [JST04_1MM_RA]  78.97,71.37 90 top
J30  QWIIC_RIGHT_ANGLE  [JST04_1MM_RA]  63.75,71.37 270 top
J31  QWIIC_RIGHT_ANGLE  [JST04_1MM_RA]  104.88,71.37 90 top
J32  QWIIC_RIGHT_ANGLE  [JST04_1MM_RA]  89.66,71.37 270 top
J33  QWIIC_RIGHT_ANGLE  [JST04_1MM_RA]  130.78,71.37 90 top
J34  QWIIC_RIGHT_ANGLE  [JST04_1MM_RA]  115.57,71.37 270 top
J35  QWIIC_RIGHT_ANGLE  [JST04_1MM_RA]  156.69,71.37 90 top
J36  QWIIC_RIGHT_ANGLE  [JST04_1MM_RA]  141.48,71.37 270 top
J37  QWIIC_RIGHT_ANGLE  [JST04_1MM_RA]  27.15,97.28 90 top
J38  QWIIC_RIGHT_ANGLE  [JST04_1MM_RA]  11.94,97.28 270 top
J39  QWIIC_RIGHT_ANGLE  [JST04_1MM_RA]  53.06,97.28 90 top
J40  QWIIC_RIGHT_ANGLE  [JST04_1MM_RA]  37.85,97.28 270 top
J41  QWIIC_RIGHT_ANGLE  [JST04_1MM_RA]  78.97,97.28 90 top
J42  QWIIC_RIGHT_ANGLE  [JST04_1MM_RA]  63.75,97.28 270 top
J43  QWIIC_RIGHT_ANGLE  [JST04_1MM_RA]  104.88,97.28 90 top
J44  QWIIC_RIGHT_ANGLE  [JST04_1MM_RA]  89.66,97.28 270 top
J45  QWIIC_RIGHT_ANGLE  [JST04_1MM_RA]  130.78,97.28 90 top
J46  QWIIC_RIGHT_ANGLE  [JST04_1MM_RA]  115.57,97.28 270 top
J47  QWIIC_RIGHT_ANGLE  [JST04_1MM_RA]  156.69,97.28 90 top
J48  QWIIC_RIGHT_ANGLE  [JST04_1MM_RA]  141.48,97.28 270 top
JP1  IO  [1X06_NO_SILK]  25.91,8.13 180 top
JP2  IO  [1X06_NO_SILK]  51.82,8.13 180 top
JP3  IO  [1X06_NO_SILK]  13.21,30.99 0 top
JP4  IO  [1X06_NO_SILK]  39.12,30.99 0 top
JP5  IO  [1X06_NO_SILK]  77.72,8.13 180 top
JP6  IO  [1X06_NO_SILK]  65.02,30.99 0 top
JP7  IO  [1X06_NO_SILK]  103.63,8.13 180 top
JP8  IO  [1X06_NO_SILK]  90.93,30.99 0 top
JP9  IO  [1X06_NO_SILK]  129.54,8.13 180 top
JP10  IO  [1X06_NO_SILK]  116.84,30.99 0 top
JP11  IO  [1X06_NO_SILK]  155.45,8.13 180 top
JP12  IO  [1X06_NO_SILK]  142.75,30.99 0 top
JP13  IO  [1X06_NO_SILK]  25.91,34.04 180 top
JP14  IO  [1X06_NO_SILK]  13.21,56.9 0 top
JP15  IO  [1X06_NO_SILK]  51.82,34.04 180 top
JP16  IO  [1X06_NO_SILK]  39.12,56.9 0 top
JP17  IO  [1X06_NO_SILK]  77.72,34.04 180 top
JP18  IO  [1X06_NO_SILK]  65.02,56.9 0 top
JP19  IO  [1X06_NO_SILK]  103.63,34.04 180 top
JP20  IO  [1X06_NO_SILK]  90.93,56.9 0 top
JP21  IO  [1X06_NO_SILK]  129.54,34.04 180 top
JP22  IO  [1X06_NO_SILK]  116.84,56.9 0 top
JP23  IO  [1X06_NO_SILK]  155.45,34.04 180 top
JP24  IO  [1X06_NO_SILK]  142.75,56.9 0 top
JP25  IO  [1X06_NO_SILK]  25.91,59.94 180 top
JP26  IO  [1X06_NO_SILK]  13.21,82.8 0 top
JP27  IO  [1X06_NO_SILK]  51.82,59.94 180 top
JP28  IO  [1X06_NO_SILK]  39.12,82.8 0 top
JP29  IO  [1X06_NO_SILK]  77.72,59.94 180 top
JP30  IO  [1X06_NO_SILK]  65.02,82.8 0 top
JP31  IO  [1X06_NO_SILK]  103.63,59.94 180 top
JP32  IO  [1X06_NO_SILK]  90.93,82.8 0 top
JP33  IO  [1X06_NO_SILK]  129.54,59.94 180 top
JP34  IO  [1X06_NO_SILK]  116.84,82.8 0 top
JP35  IO  [1X06_NO_SILK]  155.45,59.94 180 top
JP36  IO  [1X06_NO_SILK]  142.75,82.8 0 top
JP37  IO  [1X06_NO_SILK]  25.91,85.85 180 top
JP38  IO  [1X06_NO_SILK]  13.21,108.71 0 top
JP39  IO  [1X06_NO_SILK]  51.82,85.85 180 top
JP40  IO  [1X06_NO_SILK]  39.12,108.71 0 top
JP41  IO  [1X06_NO_SILK]  77.72,85.85 180 top
JP42  IO  [1X06_NO_SILK]  65.02,108.71 0 top
JP43  IO  [1X06_NO_SILK]  103.63,85.85 180 top
JP44  IO  [1X06_NO_SILK]  90.93,108.71 0 top
JP45  IO  [1X06_NO_SILK]  129.54,85.85 180 top
JP46  IO  [1X06_NO_SILK]  116.84,108.71 0 top
JP47  IO  [1X06_NO_SILK]  155.45,85.85 180 top
JP48  IO  [1X06_NO_SILK]  142.75,108.71 0 top
LED  JUMPER-SMT_2_NC_TRACE_SILK  [SMT-JUMPER_2_NC_TRACE_SILK]  8.94,24.64 0 bottom
LED1  JUMPER-SMT_2_NC_TRACE_SILK  [SMT-JUMPER_2_NC_TRACE_SILK]  34.85,24.64 0 bottom
LED2  JUMPER-SMT_2_NC_TRACE_SILK  [SMT-JUMPER_2_NC_TRACE_SILK]  60.76,24.64 0 bottom
LED3  JUMPER-SMT_2_NC_TRACE_SILK  [SMT-JUMPER_2_NC_TRACE_SILK]  86.66,24.64 0 bottom
LED4  JUMPER-SMT_2_NC_TRACE_SILK  [SMT-JUMPER_2_NC_TRACE_SILK]  112.57,24.64 0 bottom
LED5  JUMPER-SMT_2_NC_TRACE_SILK  [SMT-JUMPER_2_NC_TRACE_SILK]  138.48,24.64 0 bottom
LED6  JUMPER-SMT_2_NC_TRACE_SILK  [SMT-JUMPER_2_NC_TRACE_SILK]  8.94,50.55 0 bottom
LED7  JUMPER-SMT_2_NC_TRACE_SILK  [SMT-JUMPER_2_NC_TRACE_SILK]  34.85,50.55 0 bottom
LED8  JUMPER-SMT_2_NC_TRACE_SILK  [SMT-JUMPER_2_NC_TRACE_SILK]  60.76,50.55 0 bottom
LED9  JUMPER-SMT_2_NC_TRACE_SILK  [SMT-JUMPER_2_NC_TRACE_SILK]  86.66,50.55 0 bottom
LED10  JUMPER-SMT_2_NC_TRACE_SILK  [SMT-JUMPER_2_NC_TRACE_SILK]  112.57,50.55 0 bottom
LED11  JUMPER-SMT_2_NC_TRACE_SILK  [SMT-JUMPER_2_NC_TRACE_SILK]  138.48,50.55 0 bottom
LED12  JUMPER-SMT_2_NC_TRACE_SILK  [SMT-JUMPER_2_NC_TRACE_SILK]  8.94,76.45 0 bottom
LED13  JUMPER-SMT_2_NC_TRACE_SILK  [SMT-JUMPER_2_NC_TRACE_SILK]  34.85,76.45 0 bottom
LED14  JUMPER-SMT_2_NC_TRACE_SILK  [SMT-JUMPER_2_NC_TRACE_SILK]  60.76,76.45 0 bottom
LED15  JUMPER-SMT_2_NC_TRACE_SILK  [SMT-JUMPER_2_NC_TRACE_SILK]  86.66,76.45 0 bottom
LED16  JUMPER-SMT_2_NC_TRACE_SILK  [SMT-JUMPER_2_NC_TRACE_SILK]  112.57,76.45 0 bottom
LED17  JUMPER-SMT_2_NC_TRACE_SILK  [SMT-JUMPER_2_NC_TRACE_SILK]  138.48,76.45 0 bottom
LED18  JUMPER-SMT_2_NC_TRACE_SILK  [SMT-JUMPER_2_NC_TRACE_SILK]  8.94,102.36 0 bottom
LED19  JUMPER-SMT_2_NC_TRACE_SILK  [SMT-JUMPER_2_NC_TRACE_SILK]  34.85,102.36 0 bottom
LED20  JUMPER-SMT_2_NC_TRACE_SILK  [SMT-JUMPER_2_NC_TRACE_SILK]  60.76,102.36 0 bottom
LED21  JUMPER-SMT_2_NC_TRACE_SILK  [SMT-JUMPER_2_NC_TRACE_SILK]  86.66,102.36 0 bottom
LED22  JUMPER-SMT_2_NC_TRACE_SILK  [SMT-JUMPER_2_NC_TRACE_SILK]  112.57,102.36 0 bottom
LED23  JUMPER-SMT_2_NC_TRACE_SILK  [SMT-JUMPER_2_NC_TRACE_SILK]  138.48,102.36 0 bottom
LOGO1  QWIIC_LOGO_4MM  [QWIIC_4MM]  29.97,15.19 0 top
LOGO2  OSHW-LOGOMINI  [OSHW-LOGO-MINI]  30,25.94 0 bottom
LOGO3  SFE_LOGO_NAME_FLAMEBLANK  [BLANK]  -31.24,-17.27 0 top  (outside the outline)
LOGO4  OSHW-LOGOMINI  [OSHW-LOGO-MINI]  55.91,25.94 0 bottom
LOGO5  QWIIC_LOGO_4MM  [QWIIC_4MM]  55.88,15.19 0 top
LOGO6  SFE_LOGO_NAME_FLAMEBLANK  [BLANK]  -5.33,-17.27 0 top  (outside the outline)
LOGO7  OSHW-LOGOMINI  [OSHW-LOGO-MINI]  81.81,25.94 0 bottom
LOGO8  QWIIC_LOGO_4MM  [QWIIC_4MM]  81.79,15.19 0 top
LOGO9  SFE_LOGO_NAME_FLAMEBLANK  [BLANK]  20.57,-17.27 0 top  (outside the outline)
LOGO10  OSHW-LOGOMINI  [OSHW-LOGO-MINI]  107.72,25.94 0 bottom
LOGO11  QWIIC_LOGO_4MM  [QWIIC_4MM]  107.7,15.19 0 top
LOGO12  SFE_LOGO_NAME_FLAMEBLANK  [BLANK]  46.48,-17.27 0 top  (outside the outline)
LOGO13  OSHW-LOGOMINI  [OSHW-LOGO-MINI]  133.63,25.94 0 bottom
LOGO14  QWIIC_LOGO_4MM  [QWIIC_4MM]  133.6,15.19 0 top
LOGO15  SFE_LOGO_NAME_FLAMEBLANK  [BLANK]  72.39,-17.27 0 top  (outside the outline)
LOGO16  OSHW-LOGOMINI  [OSHW-LOGO-MINI]  159.54,25.94 0 bottom
LOGO17  QWIIC_LOGO_4MM  [QWIIC_4MM]  159.51,15.19 0 top
LOGO18  SFE_LOGO_NAME_FLAMEBLANK  [BLANK]  98.3,-17.27 0 top  (outside the outline)
LOGO19  OSHW-LOGOMINI  [OSHW-LOGO-MINI]  30,51.85 0 bottom
LOGO20  QWIIC_LOGO_4MM  [QWIIC_4MM]  29.97,41.1 0 top
LOGO21  SFE_LOGO_NAME_FLAMEBLANK  [BLANK]  -31.24,8.64 0 top  (outside the outline)
LOGO22  OSHW-LOGOMINI  [OSHW-LOGO-MINI]  55.91,51.85 0 bottom
LOGO23  QWIIC_LOGO_4MM  [QWIIC_4MM]  55.88,41.1 0 top
LOGO24  SFE_LOGO_NAME_FLAMEBLANK  [BLANK]  -5.33,8.64 0 top  (outside the outline)
LOGO25  OSHW-LOGOMINI  [OSHW-LOGO-MINI]  81.81,51.85 0 bottom
LOGO26  QWIIC_LOGO_4MM  [QWIIC_4MM]  81.79,41.1 0 top
LOGO27  SFE_LOGO_NAME_FLAMEBLANK  [BLANK]  20.57,8.64 0 top
LOGO28  OSHW-LOGOMINI  [OSHW-LOGO-MINI]  107.72,51.85 0 bottom
LOGO29  QWIIC_LOGO_4MM  [QWIIC_4MM]  107.7,41.1 0 top
LOGO30  SFE_LOGO_NAME_FLAMEBLANK  [BLANK]  46.48,8.64 0 top
LOGO31  OSHW-LOGOMINI  [OSHW-LOGO-MINI]  133.63,51.85 0 bottom
LOGO32  QWIIC_LOGO_4MM  [QWIIC_4MM]  133.6,41.1 0 top
LOGO33  SFE_LOGO_NAME_FLAMEBLANK  [BLANK]  72.39,8.64 0 top
LOGO34  OSHW-LOGOMINI  [OSHW-LOGO-MINI]  159.54,51.85 0 bottom
LOGO35  QWIIC_LOGO_4MM  [QWIIC_4MM]  159.51,41.1 0 top
LOGO36  SFE_LOGO_NAME_FLAMEBLANK  [BLANK]  98.3,8.64 0 top
LOGO37  OSHW-LOGOMINI  [OSHW-LOGO-MINI]  30,77.76 0 bottom
LOGO38  QWIIC_LOGO_4MM  [QWIIC_4MM]  29.97,67.01 0 top
LOGO39  SFE_LOGO_NAME_FLAMEBLANK  [BLANK]  -31.24,34.54 0 top  (outside the outline)
LOGO40  OSHW-LOGOMINI  [OSHW-LOGO-MINI]  55.91,77.76 0 bottom
LOGO41  QWIIC_LOGO_4MM  [QWIIC_4MM]  55.88,67.01 0 top
LOGO42  SFE_LOGO_NAME_FLAMEBLANK  [BLANK]  -5.33,34.54 0 top  (outside the outline)
LOGO43  OSHW-LOGOMINI  [OSHW-LOGO-MINI]  81.81,77.76 0 bottom
LOGO44  QWIIC_LOGO_4MM  [QWIIC_4MM]  81.79,67.01 0 top
LOGO45  SFE_LOGO_NAME_FLAMEBLANK  [BLANK]  20.57,34.54 0 top
LOGO46  OSHW-LOGOMINI  [OSHW-LOGO-MINI]  107.72,77.76 0 bottom
LOGO47  QWIIC_LOGO_4MM  [QWIIC_4MM]  107.7,67.01 0 top
LOGO48  SFE_LOGO_NAME_FLAMEBLANK  [BLANK]  46.48,34.54 0 top
LOGO49  OSHW-LOGOMINI  [OSHW-LOGO-MINI]  133.63,77.76 0 bottom
LOGO50  QWIIC_LOGO_4MM  [QWIIC_4MM]  133.6,67.01 0 top
LOGO51  SFE_LOGO_NAME_FLAMEBLANK  [BLANK]  72.39,34.54 0 top
LOGO52  OSHW-LOGOMINI  [OSHW-LOGO-MINI]  159.54,77.76 0 bottom
LOGO53  QWIIC_LOGO_4MM  [QWIIC_4MM]  159.51,67.01 0 top
LOGO54  SFE_LOGO_NAME_FLAMEBLANK  [BLANK]  98.3,34.54 0 top
LOGO55  OSHW-LOGOMINI  [OSHW-LOGO-MINI]  30,103.66 0 bottom
LOGO56  QWIIC_LOGO_4MM  [QWIIC_4MM]  29.97,92.91 0 top
LOGO57  SFE_LOGO_NAME_FLAMEBLANK  [BLANK]  -31.24,60.45 0 top  (outside the outline)
LOGO58  OSHW-LOGOMINI  [OSHW-LOGO-MINI]  55.91,103.66 0 bottom
LOGO59  QWIIC_LOGO_4MM  [QWIIC_4MM]  55.88,92.91 0 top
LOGO60  SFE_LOGO_NAME_FLAMEBLANK  [BLANK]  -5.33,60.45 0 top  (outside the outline)
LOGO61  OSHW-LOGOMINI  [OSHW-LOGO-MINI]  81.81,103.66 0 bottom
LOGO62  QWIIC_LOGO_4MM  [QWIIC_4MM]  81.79,92.91 0 top
LOGO63  SFE_LOGO_NAME_FLAMEBLANK  [BLANK]  20.57,60.45 0 top
LOGO64  OSHW-LOGOMINI  [OSHW-LOGO-MINI]  107.72,103.66 0 bottom
LOGO65  QWIIC_LOGO_4MM  [QWIIC_4MM]  107.7,92.91 0 top
LOGO66  SFE_LOGO_NAME_FLAMEBLANK  [BLANK]  46.48,60.45 0 top
LOGO67  OSHW-LOGOMINI  [OSHW-LOGO-MINI]  133.63,103.66 0 bottom
LOGO68  QWIIC_LOGO_4MM  [QWIIC_4MM]  133.6,92.91 0 top
LOGO69  SFE_LOGO_NAME_FLAMEBLANK  [BLANK]  72.39,60.45 0 top
LOGO70  OSHW-LOGOMINI  [OSHW-LOGO-MINI]  159.54,103.66 0 bottom
LOGO71  QWIIC_LOGO_4MM  [QWIIC_4MM]  159.51,92.91 0 top
LOGO72  SFE_LOGO_NAME_FLAMEBLANK  [BLANK]  98.3,60.45 0 top
P1  110pF  [0603]  20.57,25.78 90 top
P2  110pF  [0603]  15.49,25.78 90 top
P3  110pF  [0603]  46.48,25.78 90 top
P4  110pF  [0603]  41.4,25.78 90 top
P5  110pF  [0603]  72.39,25.78 90 top
P6  110pF  [0603]  67.31,25.78 90 top
P7  110pF  [0603]  98.3,25.78 90 top
P8  110pF  [0603]  93.22,25.78 90 top
P9  110pF  [0603]  124.21,25.78 90 top
P10  110pF  [0603]  119.13,25.78 90 top
P11  110pF  [0603]  150.11,25.78 90 top
P12  110pF  [0603]  145.03,25.78 90 top
P13  110pF  [0603]  20.57,51.69 90 top
P14  110pF  [0603]  15.49,51.69 90 top
P15  110pF  [0603]  46.48,51.69 90 top
P16  110pF  [0603]  41.4,51.69 90 top
P17  110pF  [0603]  72.39,51.69 90 top
P18  110pF  [0603]  67.31,51.69 90 top
P19  110pF  [0603]  98.3,51.69 90 top
P20  110pF  [0603]  93.22,51.69 90 top
P21  110pF  [0603]  124.21,51.69 90 top
P22  110pF  [0603]  119.13,51.69 90 top
P23  110pF  [0603]  150.11,51.69 90 top
P24  110pF  [0603]  145.03,51.69 90 top
P25  110pF  [0603]  20.57,77.6 90 top
P26  110pF  [0603]  15.49,77.6 90 top
P27  110pF  [0603]  46.48,77.6 90 top
P28  110pF  [0603]  41.4,77.6 90 top
P29  110pF  [0603]  72.39,77.6 90 top
P30  110pF  [0603]  67.31,77.6 90 top
P31  110pF  [0603]  98.3,77.6 90 top
P32  110pF  [0603]  93.22,77.6 90 top
P33  110pF  [0603]  124.21,77.6 90 top
P34  110pF  [0603]  119.13,77.6 90 top
P35  110pF  [0603]  150.11,77.6 90 top
P36  110pF  [0603]  145.03,77.6 90 top
P37  110pF  [0603]  20.57,103.51 90 top
P38  110pF  [0603]  15.49,103.51 90 top
P39  110pF  [0603]  46.48,103.51 90 top
P40  110pF  [0603]  41.4,103.51 90 top
P41  110pF  [0603]  72.39,103.51 90 top
P42  110pF  [0603]  67.31,103.51 90 top
P43  110pF  [0603]  98.3,103.51 90 top
P44  110pF  [0603]  93.22,103.51 90 top
P45  110pF  [0603]  124.21,103.51 90 top
P46  110pF  [0603]  119.13,103.51 90 top
P47  110pF  [0603]  150.11,103.51 90 top
P48  110pF  [0603]  145.03,103.51 90 top
PAD1  JUMPER-SMT_3_1-NC_TRACE_SILK  [SMT-JUMPER_3_1-NC_TRACE_SILK]  25.78,23.5 0 bottom
PAD2  JUMPER-SMT_3_1-NC_TRACE_SILK  [SMT-JUMPER_3_1-NC_TRACE_SILK]  13.21,23.5 180 bottom
PAD3  JUMPER-SMT_3_1-NC_TRACE_SILK  [SMT-JUMPER_3_1-NC_TRACE_SILK]  51.69,23.5 0 bottom
PAD4  JUMPER-SMT_3_1-NC_TRACE_SILK  [SMT-JUMPER_3_1-NC_TRACE_SILK]  39.12,23.5 180 bottom
PAD5  JUMPER-SMT_3_1-NC_TRACE_SILK  [SMT-JUMPER_3_1-NC_TRACE_SILK]  77.6,23.5 0 bottom
PAD6  JUMPER-SMT_3_1-NC_TRACE_SILK  [SMT-JUMPER_3_1-NC_TRACE_SILK]  65.02,23.5 180 bottom
PAD7  JUMPER-SMT_3_1-NC_TRACE_SILK  [SMT-JUMPER_3_1-NC_TRACE_SILK]  103.51,23.5 0 bottom
PAD8  JUMPER-SMT_3_1-NC_TRACE_SILK  [SMT-JUMPER_3_1-NC_TRACE_SILK]  90.93,23.5 180 bottom
PAD9  JUMPER-SMT_3_1-NC_TRACE_SILK  [SMT-JUMPER_3_1-NC_TRACE_SILK]  129.41,23.5 0 bottom
PAD10  JUMPER-SMT_3_1-NC_TRACE_SILK  [SMT-JUMPER_3_1-NC_TRACE_SILK]  116.84,23.5 180 bottom
PAD11  JUMPER-SMT_3_1-NC_TRACE_SILK  [SMT-JUMPER_3_1-NC_TRACE_SILK]  155.32,23.5 0 bottom
PAD12  JUMPER-SMT_3_1-NC_TRACE_SILK  [SMT-JUMPER_3_1-NC_TRACE_SILK]  142.75,23.5 180 bottom
PAD13  JUMPER-SMT_3_1-NC_TRACE_SILK  [SMT-JUMPER_3_1-NC_TRACE_SILK]  25.78,49.4 0 bottom
PAD14  JUMPER-SMT_3_1-NC_TRACE_SILK  [SMT-JUMPER_3_1-NC_TRACE_SILK]  13.21,49.4 180 bottom
PAD15  JUMPER-SMT_3_1-NC_TRACE_SILK  [SMT-JUMPER_3_1-NC_TRACE_SILK]  51.69,49.4 0 bottom
PAD16  JUMPER-SMT_3_1-NC_TRACE_SILK  [SMT-JUMPER_3_1-NC_TRACE_SILK]  39.12,49.4 180 bottom
PAD17  JUMPER-SMT_3_1-NC_TRACE_SILK  [SMT-JUMPER_3_1-NC_TRACE_SILK]  77.6,49.4 0 bottom
PAD18  JUMPER-SMT_3_1-NC_TRACE_SILK  [SMT-JUMPER_3_1-NC_TRACE_SILK]  65.02,49.4 180 bottom
PAD19  JUMPER-SMT_3_1-NC_TRACE_SILK  [SMT-JUMPER_3_1-NC_TRACE_SILK]  103.51,49.4 0 bottom
PAD20  JUMPER-SMT_3_1-NC_TRACE_SILK  [SMT-JUMPER_3_1-NC_TRACE_SILK]  90.93,49.4 180 bottom
PAD21  JUMPER-SMT_3_1-NC_TRACE_SILK  [SMT-JUMPER_3_1-NC_TRACE_SILK]  129.41,49.4 0 bottom
PAD22  JUMPER-SMT_3_1-NC_TRACE_SILK  [SMT-JUMPER_3_1-NC_TRACE_SILK]  116.84,49.4 180 bottom
PAD23  JUMPER-SMT_3_1-NC_TRACE_SILK  [SMT-JUMPER_3_1-NC_TRACE_SILK]  155.32,49.4 0 bottom
PAD24  JUMPER-SMT_3_1-NC_TRACE_SILK  [SMT-JUMPER_3_1-NC_TRACE_SILK]  142.75,49.4 180 bottom
PAD25  JUMPER-SMT_3_1-NC_TRACE_SILK  [SMT-JUMPER_3_1-NC_TRACE_SILK]  25.78,75.31 0 bottom
PAD26  JUMPER-SMT_3_1-NC_TRACE_SILK  [SMT-JUMPER_3_1-NC_TRACE_SILK]  13.21,75.31 180 bottom
PAD27  JUMPER-SMT_3_1-NC_TRACE_SILK  [SMT-JUMPER_3_1-NC_TRACE_SILK]  51.69,75.31 0 bottom
PAD28  JUMPER-SMT_3_1-NC_TRACE_SILK  [SMT-JUMPER_3_1-NC_TRACE_SILK]  39.12,75.31 180 bottom
PAD29  JUMPER-SMT_3_1-NC_TRACE_SILK  [SMT-JUMPER_3_1-NC_TRACE_SILK]  77.6,75.31 0 bottom
PAD30  JUMPER-SMT_3_1-NC_TRACE_SILK  [SMT-JUMPER_3_1-NC_TRACE_SILK]  65.02,75.31 180 bottom
PAD31  JUMPER-SMT_3_1-NC_TRACE_SILK  [SMT-JUMPER_3_1-NC_TRACE_SILK]  103.51,75.31 0 bottom
PAD32  JUMPER-SMT_3_1-NC_TRACE_SILK  [SMT-JUMPER_3_1-NC_TRACE_SILK]  90.93,75.31 180 bottom
PAD33  JUMPER-SMT_3_1-NC_TRACE_SILK  [SMT-JUMPER_3_1-NC_TRACE_SILK]  129.41,75.31 0 bottom
PAD34  JUMPER-SMT_3_1-NC_TRACE_SILK  [SMT-JUMPER_3_1-NC_TRACE_SILK]  116.84,75.31 180 bottom
PAD35  JUMPER-SMT_3_1-NC_TRACE_SILK  [SMT-JUMPER_3_1-NC_TRACE_SILK]  155.32,75.31 0 bottom
PAD36  JUMPER-SMT_3_1-NC_TRACE_SILK  [SMT-JUMPER_3_1-NC_TRACE_SILK]  142.75,75.31 180 bottom
PAD37  JUMPER-SMT_3_1-NC_TRACE_SILK  [SMT-JUMPER_3_1-NC_TRACE_SILK]  25.78,101.22 0 bottom
PAD38  JUMPER-SMT_3_1-NC_TRACE_SILK  [SMT-JUMPER_3_1-NC_TRACE_SILK]  13.21,101.22 180 bottom
PAD39  JUMPER-SMT_3_1-NC_TRACE_SILK  [SMT-JUMPER_3_1-NC_TRACE_SILK]  51.69,101.22 0 bottom
PAD40  JUMPER-SMT_3_1-NC_TRACE_SILK  [SMT-JUMPER_3_1-NC_TRACE_SILK]  39.12,101.22 180 bottom
PAD41  JUMPER-SMT_3_1-NC_TRACE_SILK  [SMT-JUMPER_3_1-NC_TRACE_SILK]  77.6,101.22 0 bottom
PAD42  JUMPER-SMT_3_1-NC_TRACE_SILK  [SMT-JUMPER_3_1-NC_TRACE_SILK]  65.02,101.22 180 bottom
PAD43  JUMPER-SMT_3_1-NC_TRACE_SILK  [SMT-JUMPER_3_1-NC_TRACE_SILK]  103.51,101.22 0 bottom
PAD44  JUMPER-SMT_3_1-NC_TRACE_SILK  [SMT-JUMPER_3_1-NC_TRACE_SILK]  90.93,101.22 180 bottom
PAD45  JUMPER-SMT_3_1-NC_TRACE_SILK  [SMT-JUMPER_3_1-NC_TRACE_SILK]  129.41,101.22 0 bottom
PAD46  JUMPER-SMT_3_1-NC_TRACE_SILK  [SMT-JUMPER_3_1-NC_TRACE_SILK]  116.84,101.22 180 bottom
PAD47  JUMPER-SMT_3_1-NC_TRACE_SILK  [SMT-JUMPER_3_1-NC_TRACE_SILK]  155.32,101.22 0 bottom
PAD48  JUMPER-SMT_3_1-NC_TRACE_SILK  [SMT-JUMPER_3_1-NC_TRACE_SILK]  142.75,101.22 180 bottom
R1  2.2k  [0603]  19.56,16 270 top
R2  2.2k  [0603]  21.59,16 270 top
R3  10k  [0603]  17.53,16.01 270 top
R4  4.7k  [0603]  9.83,25.2 270 top
R5  10k  [0603]  24.13,21.46 90 top
R6  10k  [0603]  24.13,16 90 top
R7  0  [0603]  22.1,25.78 90 top
R8  0  [0603]  17.02,25.78 90 top
R9  2.2k  [0603]  45.47,16 270 top
R10  2.2k  [0603]  47.5,16 270 top
R11  10k  [0603]  43.43,16.01 270 top
R12  4.7k  [0603]  35.74,25.2 270 top
R13  10k  [0603]  50.04,21.46 90 top
R14  10k  [0603]  50.04,16 90 top
R15  0  [0603]  48.01,25.78 90 top
R16  0  [0603]  42.93,25.78 90 top
R17  2.2k  [0603]  71.37,16 270 top
R18  2.2k  [0603]  73.41,16 270 top
R19  10k  [0603]  69.34,16.01 270 top
R20  4.7k  [0603]  61.65,25.2 270 top
R21  10k  [0603]  75.95,21.46 90 top
R22  10k  [0603]  75.95,16 90 top
R23  0  [0603]  73.91,25.78 90 top
R24  0  [0603]  68.83,25.78 90 top
R25  2.2k  [0603]  97.28,16 270 top
R26  2.2k  [0603]  99.31,16 270 top
R27  10k  [0603]  95.25,16.01 270 top
R28  4.7k  [0603]  87.55,25.2 270 top
R29  10k  [0603]  101.85,21.46 90 top
R30  10k  [0603]  101.85,16 90 top
R31  0  [0603]  99.82,25.78 90 top
R32  0  [0603]  94.74,25.78 90 top
R33  2.2k  [0603]  123.19,16 270 top
R34  2.2k  [0603]  125.22,16 270 top
R35  10k  [0603]  121.16,16.01 270 top
R36  4.7k  [0603]  113.46,25.2 270 top
R37  10k  [0603]  127.76,21.46 90 top
R38  10k  [0603]  127.76,16 90 top
R39  0  [0603]  125.73,25.78 90 top
R40  0  [0603]  120.65,25.78 90 top
R41  2.2k  [0603]  149.1,16 270 top
R42  2.2k  [0603]  151.13,16 270 top
R43  10k  [0603]  147.07,16.01 270 top
R44  4.7k  [0603]  139.37,25.2 270 top
R45  10k  [0603]  153.67,21.46 90 top
R46  10k  [0603]  153.67,16 90 top
R47  0  [0603]  151.64,25.78 90 top
R48  0  [0603]  146.56,25.78 90 top
R49  2.2k  [0603]  19.56,41.91 270 top
R50  2.2k  [0603]  21.59,41.91 270 top
R51  10k  [0603]  17.53,41.92 270 top
R52  4.7k  [0603]  9.83,51.1 270 top
R53  10k  [0603]  24.13,47.37 90 top
R54  10k  [0603]  24.13,41.91 90 top
R55  0  [0603]  22.1,51.69 90 top
R56  0  [0603]  17.02,51.69 90 top
R57  2.2k  [0603]  45.47,41.91 270 top
R58  2.2k  [0603]  47.5,41.91 270 top
R59  10k  [0603]  43.43,41.92 270 top
R60  4.7k  [0603]  35.74,51.1 270 top
R61  10k  [0603]  50.04,47.37 90 top
R62  10k  [0603]  50.04,41.91 90 top
R63  0  [0603]  48.01,51.69 90 top
R64  0  [0603]  42.93,51.69 90 top
R65  2.2k  [0603]  71.37,41.91 270 top
R66  2.2k  [0603]  73.41,41.91 270 top
R67  10k  [0603]  69.34,41.92 270 top
R68  4.7k  [0603]  61.65,51.1 270 top
R69  10k  [0603]  75.95,47.37 90 top
R70  10k  [0603]  75.95,41.91 90 top
R71  0  [0603]  73.91,51.69 90 top
R72  0  [0603]  68.83,51.69 90 top
R73  2.2k  [0603]  97.28,41.91 270 top
R74  2.2k  [0603]  99.31,41.91 270 top
R75  10k  [0603]  95.25,41.92 270 top
R76  4.7k  [0603]  87.55,51.1 270 top
R77  10k  [0603]  101.85,47.37 90 top
R78  10k  [0603]  101.85,41.91 90 top
R79  0  [0603]  99.82,51.69 90 top
R80  0  [0603]  94.74,51.69 90 top
R81  2.2k  [0603]  123.19,41.91 270 top
R82  2.2k  [0603]  125.22,41.91 270 top
R83  10k  [0603]  121.16,41.92 270 top
R84  4.7k  [0603]  113.46,51.1 270 top
R85  10k  [0603]  127.76,47.37 90 top
R86  10k  [0603]  127.76,41.91 90 top
R87  0  [0603]  125.73,51.69 90 top
R88  0  [0603]  120.65,51.69 90 top
R89  2.2k  [0603]  149.1,41.91 270 top
R90  2.2k  [0603]  151.13,41.91 270 top
R91  10k  [0603]  147.07,41.92 270 top
R92  4.7k  [0603]  139.37,51.1 270 top
R93  10k  [0603]  153.67,47.37 90 top
R94  10k  [0603]  153.67,41.91 90 top
R95  0  [0603]  151.64,51.69 90 top
R96  0  [0603]  146.56,51.69 90 top
R97  2.2k  [0603]  19.56,67.82 270 top
R98  2.2k  [0603]  21.59,67.82 270 top
R99  10k  [0603]  17.53,67.83 270 top
R100  4.7k  [0603]  9.83,77.01 270 top
R101  10k  [0603]  24.13,73.28 90 top
R102  10k  [0603]  24.13,67.82 90 top
R103  0  [0603]  22.1,77.6 90 top
R104  0  [0603]  17.02,77.6 90 top
R105  2.2k  [0603]  45.47,67.82 270 top
R106  2.2k  [0603]  47.5,67.82 270 top
R107  10k  [0603]  43.43,67.83 270 top
R108  4.7k  [0603]  35.74,77.01 270 top
R109  10k  [0603]  50.04,73.28 90 top
R110  10k  [0603]  50.04,67.82 90 top
R111  0  [0603]  48.01,77.6 90 top
R112  0  [0603]  42.93,77.6 90 top
R113  2.2k  [0603]  71.37,67.82 270 top
R114  2.2k  [0603]  73.41,67.82 270 top
R115  10k  [0603]  69.34,67.83 270 top
R116  4.7k  [0603]  61.65,77.01 270 top
R117  10k  [0603]  75.95,73.28 90 top
R118  10k  [0603]  75.95,67.82 90 top
R119  0  [0603]  73.91,77.6 90 top
R120  0  [0603]  68.83,77.6 90 top
R121  2.2k  [0603]  97.28,67.82 270 top
R122  2.2k  [0603]  99.31,67.82 270 top
R123  10k  [0603]  95.25,67.83 270 top
R124  4.7k  [0603]  87.55,77.01 270 top
R125  10k  [0603]  101.85,73.28 90 top
R126  10k  [0603]  101.85,67.82 90 top
R127  0  [0603]  99.82,77.6 90 top
R128  0  [0603]  94.74,77.6 90 top
R129  2.2k  [0603]  123.19,67.82 270 top
R130  2.2k  [0603]  125.22,67.82 270 top
R131  10k  [0603]  121.16,67.83 270 top
R132  4.7k  [0603]  113.46,77.01 270 top
R133  10k  [0603]  127.76,73.28 90 top
R134  10k  [0603]  127.76,67.82 90 top
R135  0  [0603]  125.73,77.6 90 top
R136  0  [0603]  120.65,77.6 90 top
R137  2.2k  [0603]  149.1,67.82 270 top
R138  2.2k  [0603]  151.13,67.82 270 top
R139  10k  [0603]  147.07,67.83 270 top
R140  4.7k  [0603]  139.37,77.01 270 top
R141  10k  [0603]  153.67,73.28 90 top
R142  10k  [0603]  153.67,67.82 90 top
R143  0  [0603]  151.64,77.6 90 top
R144  0  [0603]  146.56,77.6 90 top
R145  2.2k  [0603]  19.56,93.73 270 top
R146  2.2k  [0603]  21.59,93.73 270 top
R147  10k  [0603]  17.53,93.74 270 top
R148  4.7k  [0603]  9.83,102.92 270 top
R149  10k  [0603]  24.13,99.19 90 top
R150  10k  [0603]  24.13,93.73 90 top
R151  0  [0603]  22.1,103.51 90 top
R152  0  [0603]  17.02,103.51 90 top
R153  2.2k  [0603]  45.47,93.73 270 top
R154  2.2k  [0603]  47.5,93.73 270 top
R155  10k  [0603]  43.43,93.74 270 top
R156  4.7k  [0603]  35.74,102.92 270 top
R157  10k  [0603]  50.04,99.19 90 top
R158  10k  [0603]  50.04,93.73 90 top
R159  0  [0603]  48.01,103.51 90 top
R160  0  [0603]  42.93,103.51 90 top
R161  2.2k  [0603]  71.37,93.73 270 top
R162  2.2k  [0603]  73.41,93.73 270 top
R163  10k  [0603]  69.34,93.74 270 top
R164  4.7k  [0603]  61.65,102.92 270 top
R165  10k  [0603]  75.95,99.19 90 top
R166  10k  [0603]  75.95,93.73 90 top
R167  0  [0603]  73.91,103.51 90 top
R168  0  [0603]  68.83,103.51 90 top
R169  2.2k  [0603]  97.28,93.73 270 top
R170  2.2k  [0603]  99.31,93.73 270 top
R171  10k  [0603]  95.25,93.74 270 top
R172  4.7k  [0603]  87.55,102.92 270 top
R173  10k  [0603]  101.85,99.19 90 top
R174  10k  [0603]  101.85,93.73 90 top
R175  0  [0603]  99.82,103.51 90 top
R176  0  [0603]  94.74,103.51 90 top
R177  2.2k  [0603]  123.19,93.73 270 top
R178  2.2k  [0603]  125.22,93.73 270 top
R179  10k  [0603]  121.16,93.74 270 top
R180  4.7k  [0603]  113.46,102.92 270 top
R181  10k  [0603]  127.76,99.19 90 top
R182  10k  [0603]  127.76,93.73 90 top
R183  0  [0603]  125.73,103.51 90 top
R184  0  [0603]  120.65,103.51 90 top
R185  2.2k  [0603]  149.1,93.73 270 top
R186  2.2k  [0603]  151.13,93.73 270 top
R187  10k  [0603]  147.07,93.74 270 top
R188  4.7k  [0603]  139.37,102.92 270 top
R189  10k  [0603]  153.67,99.19 90 top
R190  10k  [0603]  153.67,93.73 90 top
R191  0  [0603]  151.64,103.51 90 top
R192  0  [0603]  146.56,103.51 90 top
SCX  JUMPER-SMT_2_NC_TRACE_SILK  [SMT-JUMPER_2_NC_TRACE_SILK]  17.53,23.5 0 bottom
SCX1  JUMPER-SMT_2_NC_TRACE_SILK  [SMT-JUMPER_2_NC_TRACE_SILK]  43.43,23.5 0 bottom
SCX2  JUMPER-SMT_2_NC_TRACE_SILK  [SMT-JUMPER_2_NC_TRACE_SILK]  69.34,23.5 0 bottom
SCX3  JUMPER-SMT_2_NC_TRACE_SILK  [SMT-JUMPER_2_NC_TRACE_SILK]  95.25,23.5 0 bottom
SCX4  JUMPER-SMT_2_NC_TRACE_SILK  [SMT-JUMPER_2_NC_TRACE_SILK]  121.16,23.5 0 bottom
SCX5  JUMPER-SMT_2_NC_TRACE_SILK  [SMT-JUMPER_2_NC_TRACE_SILK]  147.07,23.5 0 bottom
SCX6  JUMPER-SMT_2_NC_TRACE_SILK  [SMT-JUMPER_2_NC_TRACE_SILK]  17.53,49.4 0 bottom
SCX7  JUMPER-SMT_2_NC_TRACE_SILK  [SMT-JUMPER_2_NC_TRACE_SILK]  43.43,49.4 0 bottom
SCX8  JUMPER-SMT_2_NC_TRACE_SILK  [SMT-JUMPER_2_NC_TRACE_SILK]  69.34,49.4 0 bottom
SCX9  JUMPER-SMT_2_NC_TRACE_SILK  [SMT-JUMPER_2_NC_TRACE_SILK]  95.25,49.4 0 bottom
SCX10  JUMPER-SMT_2_NC_TRACE_SILK  [SMT-JUMPER_2_NC_TRACE_SILK]  121.16,49.4 0 bottom
SCX11  JUMPER-SMT_2_NC_TRACE_SILK  [SMT-JUMPER_2_NC_TRACE_SILK]  147.07,49.4 0 bottom
SCX12  JUMPER-SMT_2_NC_TRACE_SILK  [SMT-JUMPER_2_NC_TRACE_SILK]  17.53,75.31 0 bottom
SCX13  JUMPER-SMT_2_NC_TRACE_SILK  [SMT-JUMPER_2_NC_TRACE_SILK]  43.43,75.31 0 bottom
SCX14  JUMPER-SMT_2_NC_TRACE_SILK  [SMT-JUMPER_2_NC_TRACE_SILK]  69.34,75.31 0 bottom
SCX15  JUMPER-SMT_2_NC_TRACE_SILK  [SMT-JUMPER_2_NC_TRACE_SILK]  95.25,75.31 0 bottom
SCX16  JUMPER-SMT_2_NC_TRACE_SILK  [SMT-JUMPER_2_NC_TRACE_SILK]  121.16,75.31 0 bottom
SCX17  JUMPER-SMT_2_NC_TRACE_SILK  [SMT-JUMPER_2_NC_TRACE_SILK]  147.07,75.31 0 bottom
SCX18  JUMPER-SMT_2_NC_TRACE_SILK  [SMT-JUMPER_2_NC_TRACE_SILK]  17.53,101.22 0 bottom
SCX19  JUMPER-SMT_2_NC_TRACE_SILK  [SMT-JUMPER_2_NC_TRACE_SILK]  43.43,101.22 0 bottom
SCX20  JUMPER-SMT_2_NC_TRACE_SILK  [SMT-JUMPER_2_NC_TRACE_SILK]  69.34,101.22 0 bottom
SCX21  JUMPER-SMT_2_NC_TRACE_SILK  [SMT-JUMPER_2_NC_TRACE_SILK]  95.25,101.22 0 bottom
SCX22  JUMPER-SMT_2_NC_TRACE_SILK  [SMT-JUMPER_2_NC_TRACE_SILK]  121.16,101.22 0 bottom
SCX23  JUMPER-SMT_2_NC_TRACE_SILK  [SMT-JUMPER_2_NC_TRACE_SILK]  147.07,101.22 0 bottom
SDX  JUMPER-SMT_2_NC_TRACE_SILK  [SMT-JUMPER_2_NC_TRACE_SILK]  21.46,23.5 180 bottom
SDX1  JUMPER-SMT_2_NC_TRACE_SILK  [SMT-JUMPER_2_NC_TRACE_SILK]  47.37,23.5 180 bottom
SDX2  JUMPER-SMT_2_NC_TRACE_SILK  [SMT-JUMPER_2_NC_TRACE_SILK]  73.28,23.5 180 bottom
SDX3  JUMPER-SMT_2_NC_TRACE_SILK  [SMT-JUMPER_2_NC_TRACE_SILK]  99.19,23.5 180 bottom
SDX4  JUMPER-SMT_2_NC_TRACE_SILK  [SMT-JUMPER_2_NC_TRACE_SILK]  125.09,23.5 180 bottom
SDX5  JUMPER-SMT_2_NC_TRACE_SILK  [SMT-JUMPER_2_NC_TRACE_SILK]  151,23.5 180 bottom
SDX6  JUMPER-SMT_2_NC_TRACE_SILK  [SMT-JUMPER_2_NC_TRACE_SILK]  21.46,49.4 180 bottom
SDX7  JUMPER-SMT_2_NC_TRACE_SILK  [SMT-JUMPER_2_NC_TRACE_SILK]  47.37,49.4 180 bottom
SDX8  JUMPER-SMT_2_NC_TRACE_SILK  [SMT-JUMPER_2_NC_TRACE_SILK]  73.28,49.4 180 bottom
SDX9  JUMPER-SMT_2_NC_TRACE_SILK  [SMT-JUMPER_2_NC_TRACE_SILK]  99.19,49.4 180 bottom
SDX10  JUMPER-SMT_2_NC_TRACE_SILK  [SMT-JUMPER_2_NC_TRACE_SILK]  125.09,49.4 180 bottom
SDX11  JUMPER-SMT_2_NC_TRACE_SILK  [SMT-JUMPER_2_NC_TRACE_SILK]  151,49.4 180 bottom
SDX12  JUMPER-SMT_2_NC_TRACE_SILK  [SMT-JUMPER_2_NC_TRACE_SILK]  21.46,75.31 180 bottom
SDX13  JUMPER-SMT_2_NC_TRACE_SILK  [SMT-JUMPER_2_NC_TRACE_SILK]  47.37,75.31 180 bottom
SDX14  JUMPER-SMT_2_NC_TRACE_SILK  [SMT-JUMPER_2_NC_TRACE_SILK]  73.28,75.31 180 bottom
SDX15  JUMPER-SMT_2_NC_TRACE_SILK  [SMT-JUMPER_2_NC_TRACE_SILK]  99.19,75.31 180 bottom
SDX16  JUMPER-SMT_2_NC_TRACE_SILK  [SMT-JUMPER_2_NC_TRACE_SILK]  125.09,75.31 180 bottom
SDX17  JUMPER-SMT_2_NC_TRACE_SILK  [SMT-JUMPER_2_NC_TRACE_SILK]  151,75.31 180 bottom
SDX18  JUMPER-SMT_2_NC_TRACE_SILK  [SMT-JUMPER_2_NC_TRACE_SILK]  21.46,101.22 180 bottom
SDX19  JUMPER-SMT_2_NC_TRACE_SILK  [SMT-JUMPER_2_NC_TRACE_SILK]  47.37,101.22 180 bottom
SDX20  JUMPER-SMT_2_NC_TRACE_SILK  [SMT-JUMPER_2_NC_TRACE_SILK]  73.28,101.22 180 bottom
SDX21  JUMPER-SMT_2_NC_TRACE_SILK  [SMT-JUMPER_2_NC_TRACE_SILK]  99.19,101.22 180 bottom
SDX22  JUMPER-SMT_2_NC_TRACE_SILK  [SMT-JUMPER_2_NC_TRACE_SILK]  125.09,101.22 180 bottom
SDX23  JUMPER-SMT_2_NC_TRACE_SILK  [SMT-JUMPER_2_NC_TRACE_SILK]  151,101.22 180 bottom
STANDOFF1  STAND-OFFTIGHT  [STAND-OFF-TIGHT]  9.4,29.72 0 top
STANDOFF2  STAND-OFFTIGHT  [STAND-OFF-TIGHT]  9.4,9.4 0 top
STANDOFF3  STAND-OFFTIGHT  [STAND-OFF-TIGHT]  29.72,9.4 0 top
STANDOFF4  STAND-OFFTIGHT  [STAND-OFF-TIGHT]  29.72,29.72 0 top
STANDOFF5  STAND-OFFTIGHT  [STAND-OFF-TIGHT]  35.31,29.72 0 top
STANDOFF6  STAND-OFFTIGHT  [STAND-OFF-TIGHT]  35.31,9.4 0 top
STANDOFF7  STAND-OFFTIGHT  [STAND-OFF-TIGHT]  55.63,9.4 0 top
STANDOFF8  STAND-OFFTIGHT  [STAND-OFF-TIGHT]  55.63,29.72 0 top
STANDOFF9  STAND-OFFTIGHT  [STAND-OFF-TIGHT]  61.21,29.72 0 top
STANDOFF10  STAND-OFFTIGHT  [STAND-OFF-TIGHT]  61.21,9.4 0 top
STANDOFF11  STAND-OFFTIGHT  [STAND-OFF-TIGHT]  81.53,9.4 0 top
STANDOFF12  STAND-OFFTIGHT  [STAND-OFF-TIGHT]  81.53,29.72 0 top
STANDOFF13  STAND-OFFTIGHT  [STAND-OFF-TIGHT]  87.12,29.72 0 top
STANDOFF14  STAND-OFFTIGHT  [STAND-OFF-TIGHT]  87.12,9.4 0 top
STANDOFF15  STAND-OFFTIGHT  [STAND-OFF-TIGHT]  107.44,9.4 0 top
STANDOFF16  STAND-OFFTIGHT  [STAND-OFF-TIGHT]  107.44,29.72 0 top
STANDOFF17  STAND-OFFTIGHT  [STAND-OFF-TIGHT]  113.03,29.72 0 top
STANDOFF18  STAND-OFFTIGHT  [STAND-OFF-TIGHT]  113.03,9.4 0 top
STANDOFF19  STAND-OFFTIGHT  [STAND-OFF-TIGHT]  133.35,9.4 0 top
STANDOFF20  STAND-OFFTIGHT  [STAND-OFF-TIGHT]  133.35,29.72 0 top
STANDOFF21  STAND-OFFTIGHT  [STAND-OFF-TIGHT]  138.94,29.72 0 top
STANDOFF22  STAND-OFFTIGHT  [STAND-OFF-TIGHT]  138.94,9.4 0 top
STANDOFF23  STAND-OFFTIGHT  [STAND-OFF-TIGHT]  159.26,9.4 0 top
STANDOFF24  STAND-OFFTIGHT  [STAND-OFF-TIGHT]  159.26,29.72 0 top
STANDOFF25  STAND-OFFTIGHT  [STAND-OFF-TIGHT]  9.4,55.63 0 top
STANDOFF26  STAND-OFFTIGHT  [STAND-OFF-TIGHT]  9.4,35.31 0 top
STANDOFF27  STAND-OFFTIGHT  [STAND-OFF-TIGHT]  29.72,35.31 0 top
STANDOFF28  STAND-OFFTIGHT  [STAND-OFF-TIGHT]  29.72,55.63 0 top
STANDOFF29  STAND-OFFTIGHT  [STAND-OFF-TIGHT]  35.31,55.63 0 top
STANDOFF30  STAND-OFFTIGHT  [STAND-OFF-TIGHT]  35.31,35.31 0 top
STANDOFF31  STAND-OFFTIGHT  [STAND-OFF-TIGHT]  55.63,35.31 0 top
STANDOFF32  STAND-OFFTIGHT  [STAND-OFF-TIGHT]  55.63,55.63 0 top
STANDOFF33  STAND-OFFTIGHT  [STAND-OFF-TIGHT]  61.21,55.63 0 top
STANDOFF34  STAND-OFFTIGHT  [STAND-OFF-TIGHT]  61.21,35.31 0 top
STANDOFF35  STAND-OFFTIGHT  [STAND-OFF-TIGHT]  81.53,35.31 0 top
STANDOFF36  STAND-OFFTIGHT  [STAND-OFF-TIGHT]  81.53,55.63 0 top